# Allegro board Cuberobot.brd
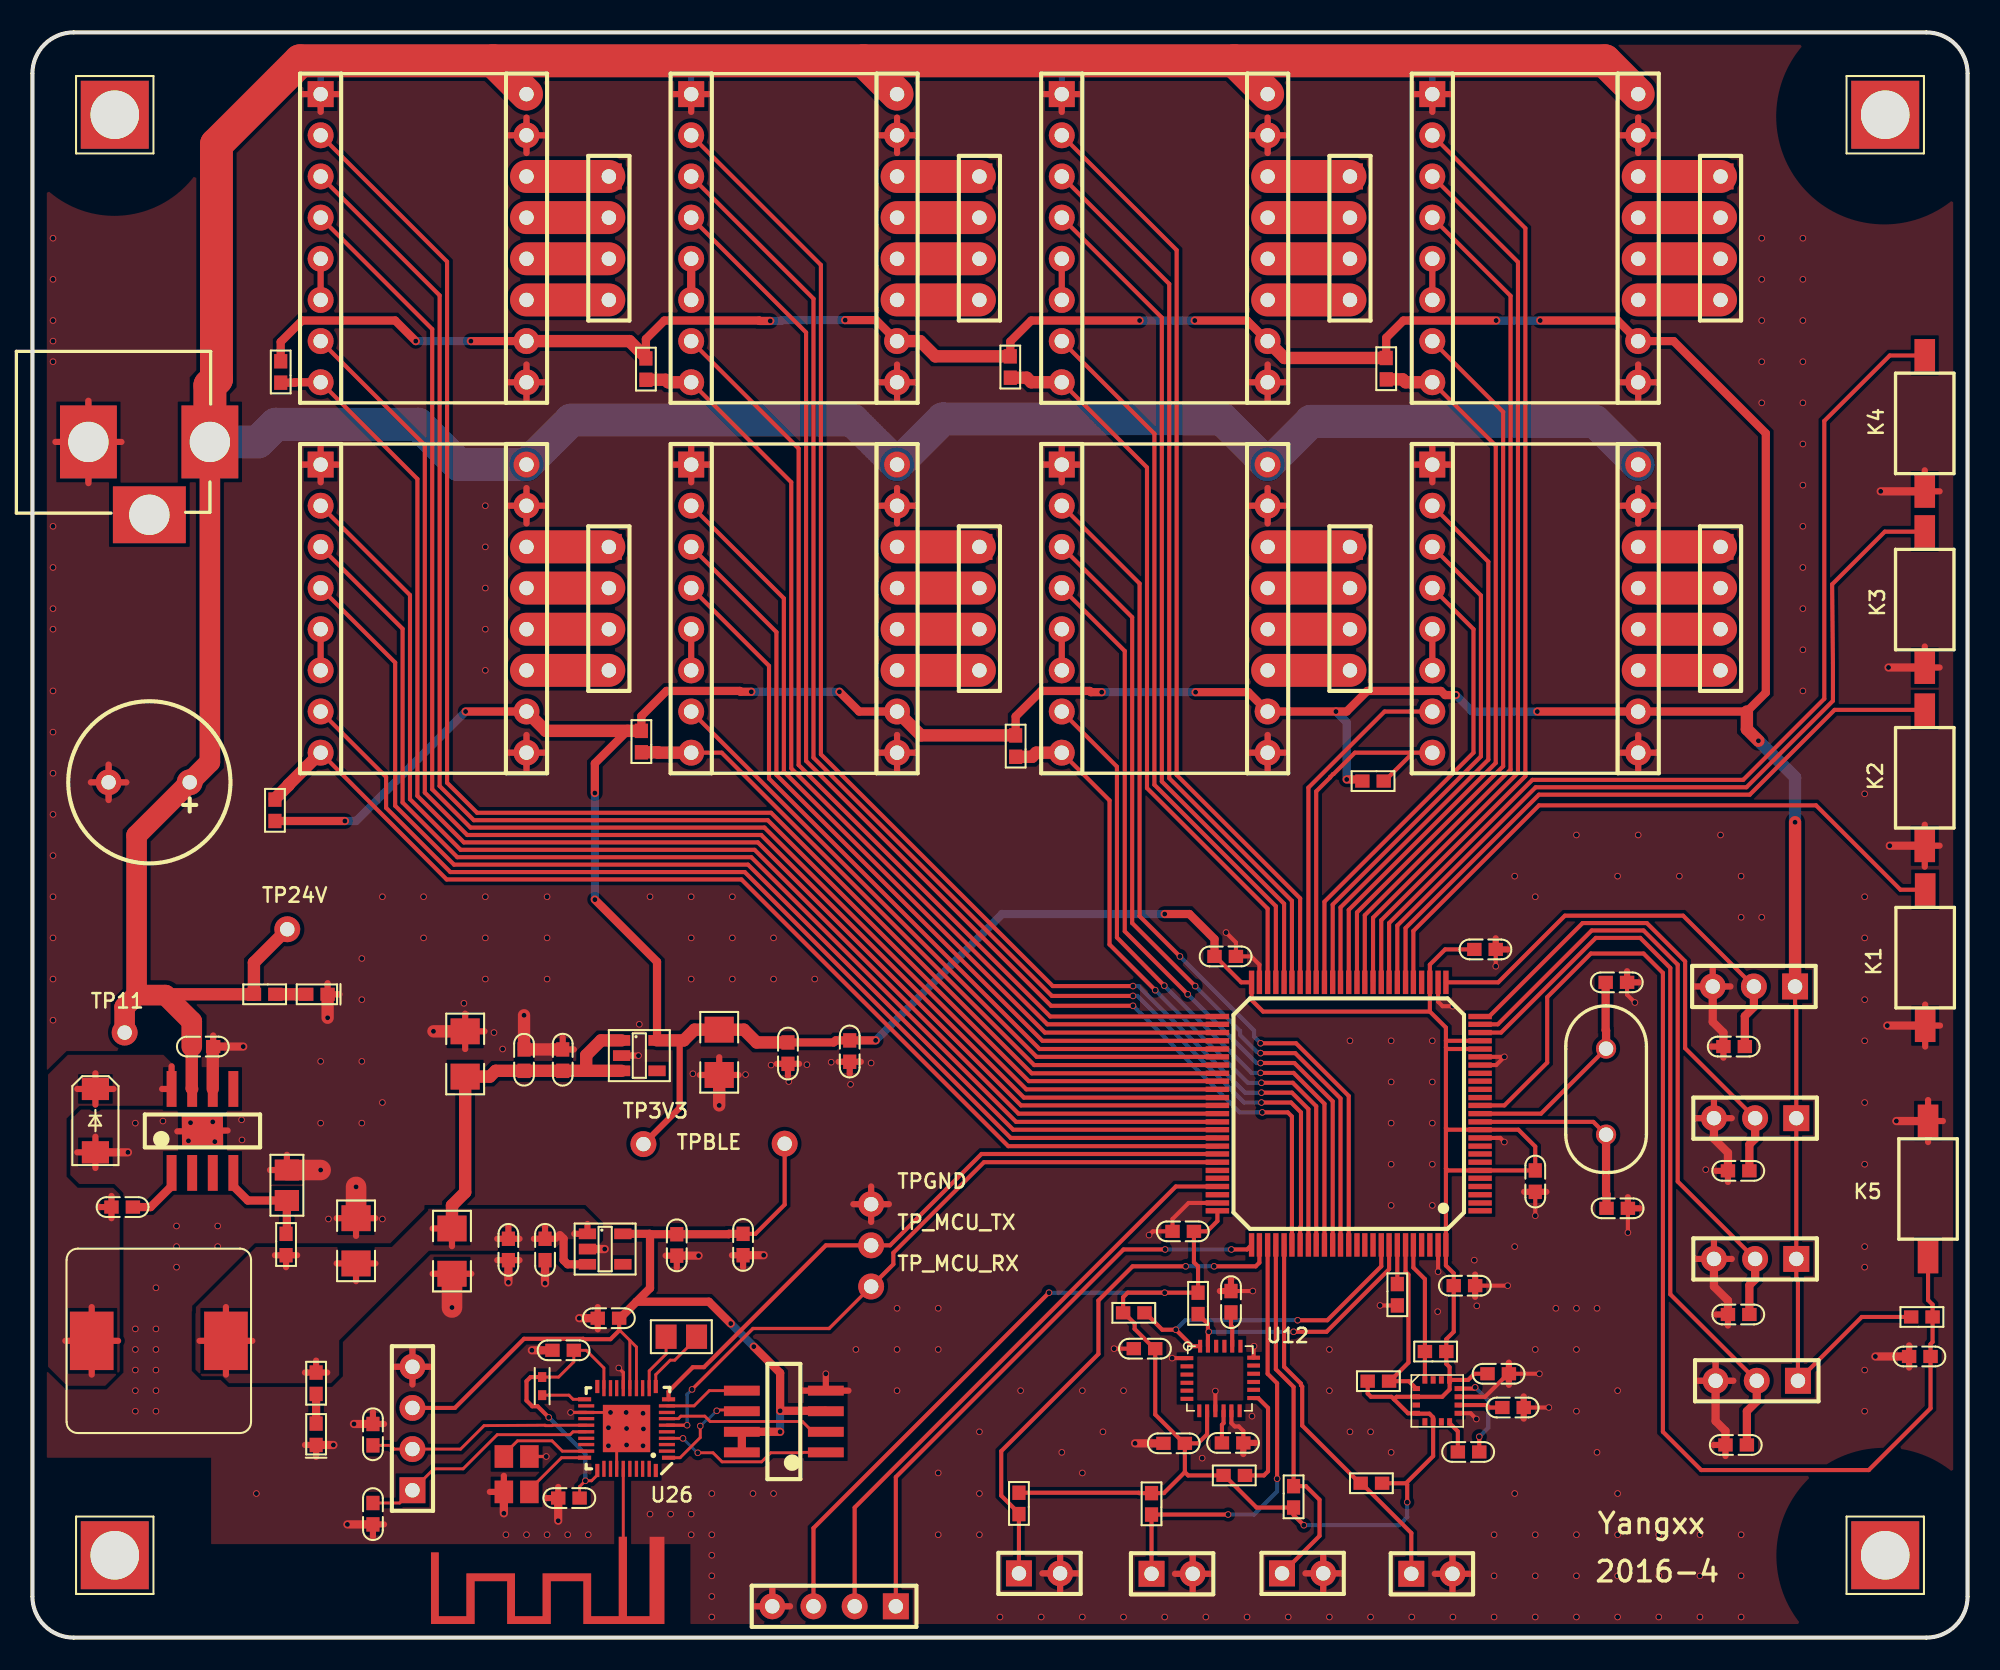
[diagram p0: board, top side]
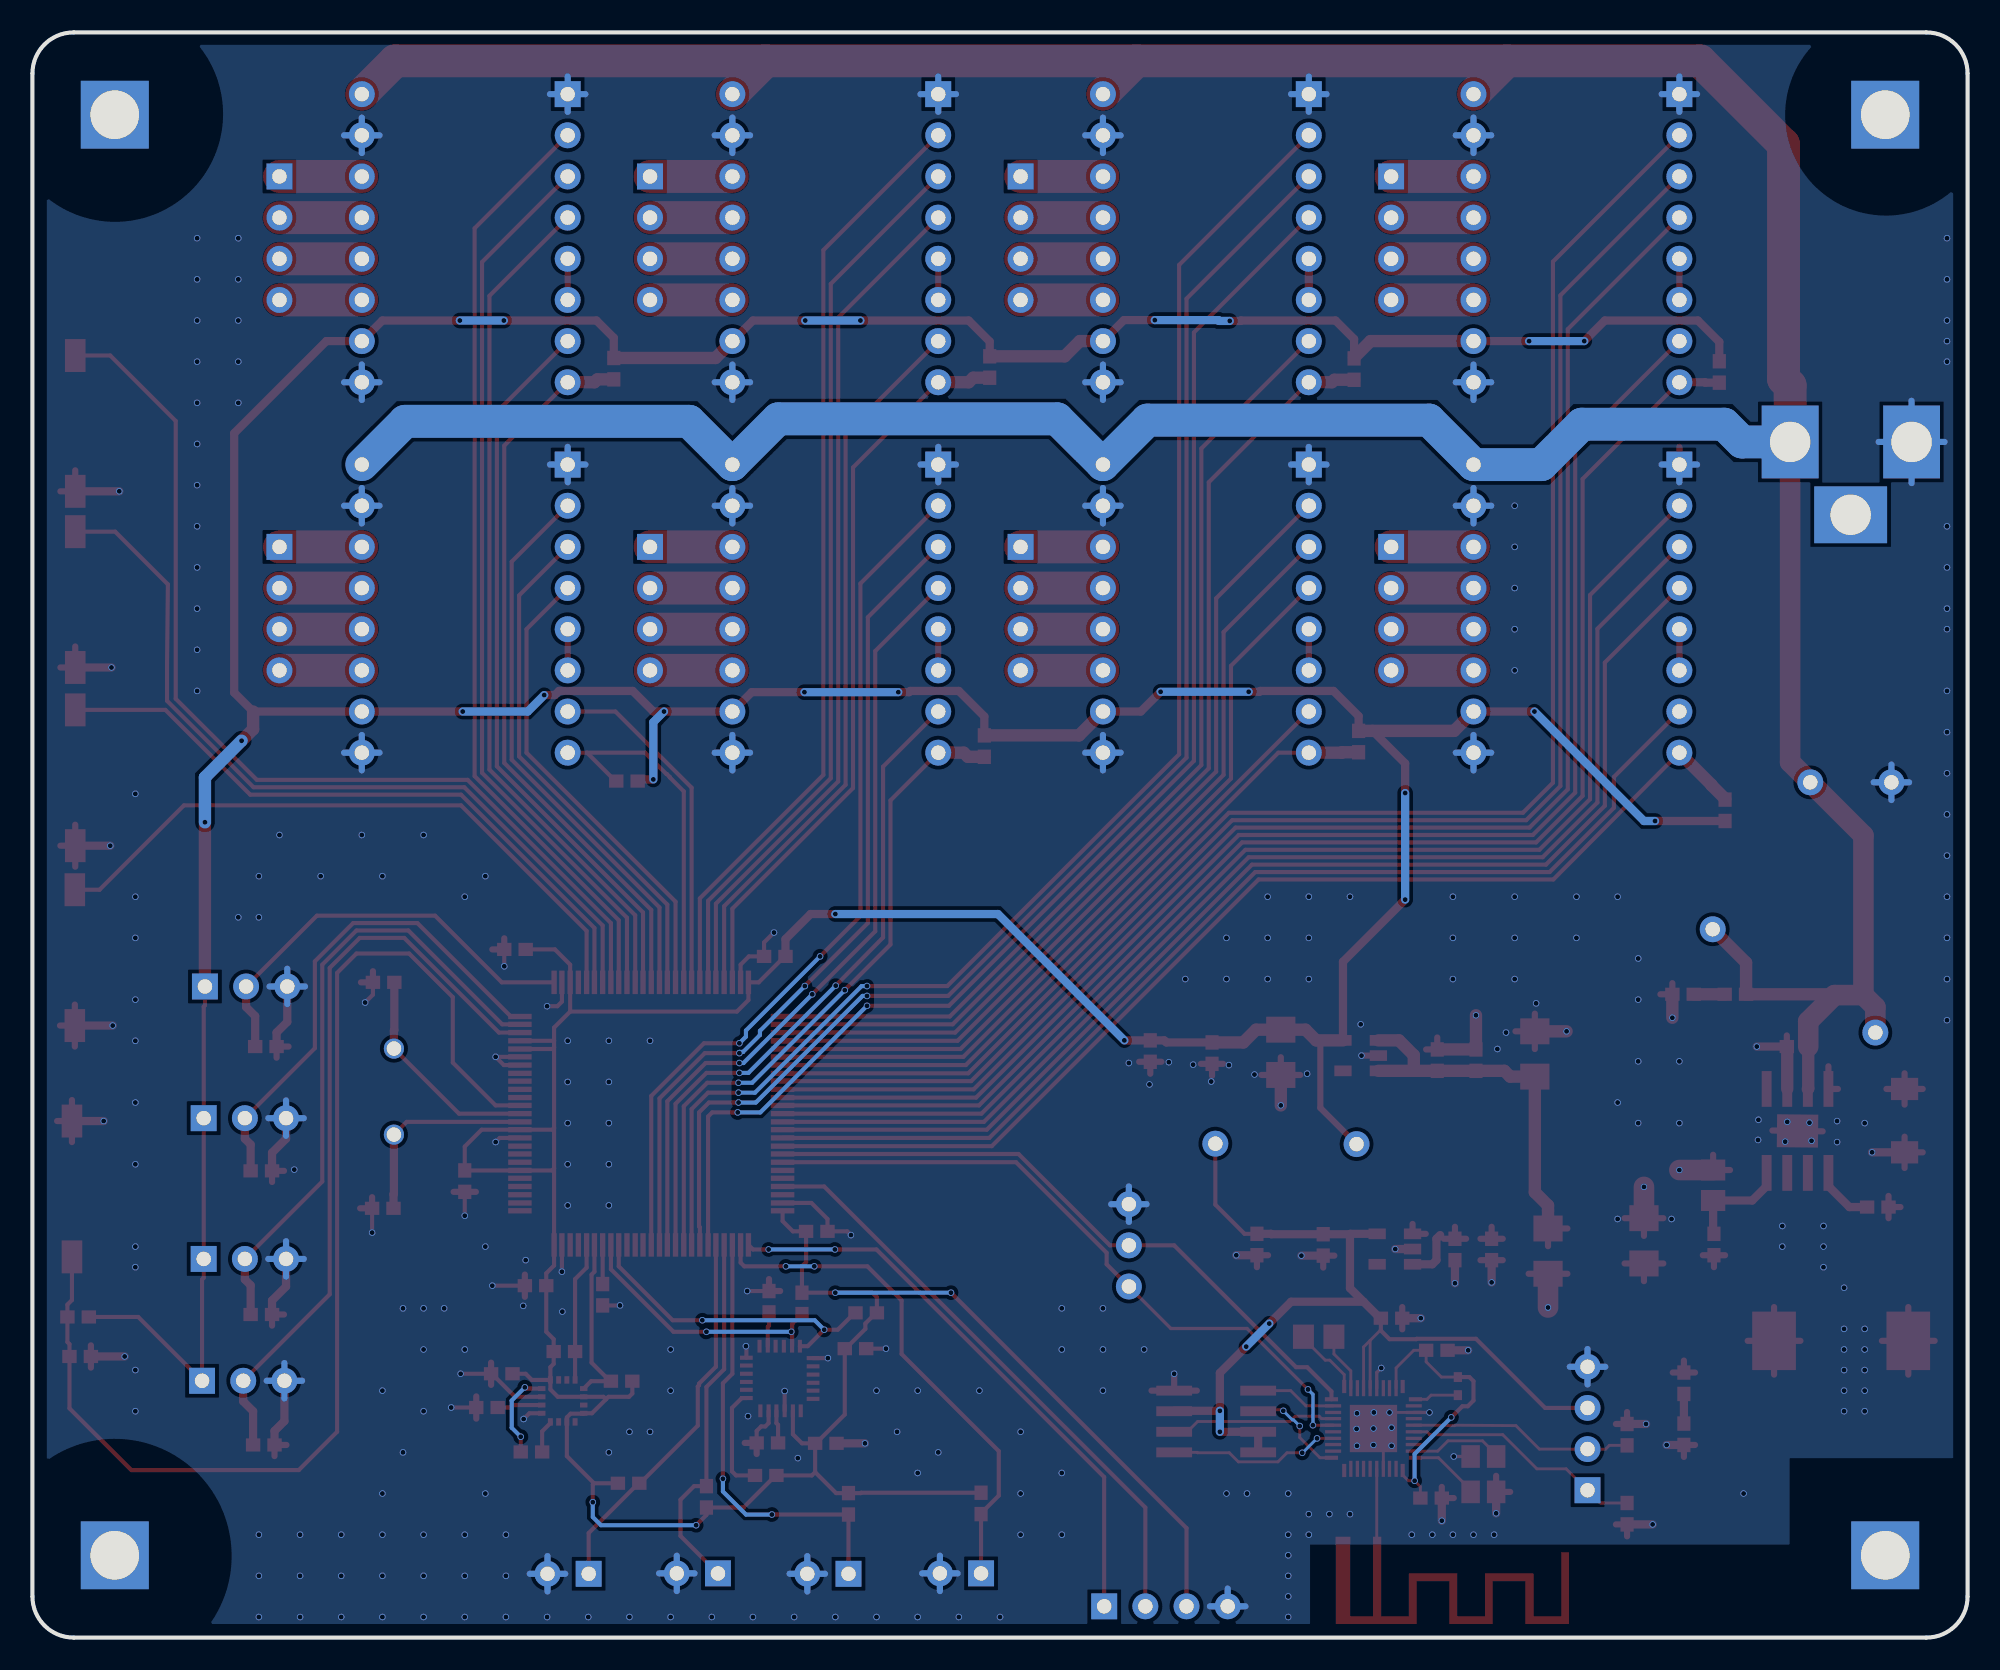
[diagram p1: board, bottom side, seen from below]

Outline 119.38 x 99.06 mm; copper layers: TOP, BOTTOM. Coordinates in mm from the lower left corner of the outline.
Outline path: 0,96.52 0,2.54 arc(0.74,0.74) 2.54,0 116.84,0 arc(118.64,0.74) 119.38,2.54 119.38,96.52 arc(118.64,98.32) 116.84,99.06 2.54,99.06 arc(0.74,98.32) 0,96.52

## Placement (name value [footprint] x y rotation side)
C2  22pF  [0603C]  97.76 26.49 180 top
C3  22pF  [0603C]  97.71 40.44 180 top
C4  104  [0603C]  116.43 17.35 0 top
C5  105  [0603C]  32.72 35.64 270 top
C6  103  [0603C]  50.42 36.2 90 top
C8  1uF  [0603C]  29.36 23.95 90 top
C9  103  [0603C]  43.84 24.26 90 top
C15  103  [0603C]  70.43 11.99 0 top
C16  104  [0603C]  74.04 12.01 180 top
C17  104  [0603C]  68.61 17.83 180 top
C18  2.2nF  [0603C]  73.94 20.73 90 top
C29  104  [0603C]  46.61 36.07 90 top
C30  104  [0603C]  39.75 24.23 90 top
C31  10uF  [0603C]  30.33 35.64 270 top
C32  10uF  [0603C]  31.62 23.95 90 top
C41  104  [0603C]  70.99 25.07 0 top
C42  104  [0603C]  88.34 21.72 180 top
C43  104  [0603C]  92.71 28.17 90 top
C44  1uF  [0603C]  35.53 19.71 180 top
C45  104  [0603C]  32.74 17.73 180 top
C58  100uF  [1206C]  26.7 36.02 270 top
C60  22uF  [1206C]  25.88 23.85 90 top
C62  100uF  [1206C]  42.37 36.12 90 top
C63  104  [0603C]  90.42 16.28 180 top
C64  0.22uF  [0603C]  88.6 11.46 0 top
C65  4.7uF  [0603C]  91.34 14.2 0 top
C67  100pF  [0603C]  21.01 7.65 90 top
C68  100pF  [0603C]  21.01 12.52 270 top
C69  1uF  [0603C]  33.1 8.61 180 top
C70  103  [0603C]  5.54 26.57 180 top
C73  100uF  [CAP-5R0-10X13]  9.7 52.78 180 top
C74  4.7uF  [0603C]  10.49 36.47 180 top
C75  100uF  [1206C]  19.96 24.49 270 top
C76  104  [0603C]  73.58 42.04 180 top
C77  104  [0603C]  89.61 42.47 180 top
C78  104  [0603C]  105.11 11.89 0 top
C79  104  [0603C]  105.26 19.94 0 top
C80  104  [0603C]  104.98 36.47 0 top
C81  104  [0603C]  105.26 28.8 0 top
D1  B340A  [SMA]  3.89 31.9 270 top
D2  LED  [0603LED]  17.55 39.7 0 top
D3  LED  [0603LED]  17.5 12.55 270 top
J14  SIP1*4  [SIP-4-2R5]  104.14 67.31 270 top
J15  SIP1*4  [SIP-4-2R5]  104.14 90.17 270 top
J16  SIP1*4  [SIP-4-2R5]  81.28 67.31 270 top
J17  SIP1*4  [SIP-4-2R5]  81.28 90.17 270 top
J18  SIP1*4  [SIP-4-2R5]  58.42 67.31 270 top
J19  SIP1*4  [SIP-4-2R5]  58.42 90.17 270 top
J20  SIP1*4  [SIP-4-2R5]  35.56 67.31 270 top
J21  SIP1*4  [SIP-4-2R5]  35.56 90.17 270 top
J22  SIP1*4  [SIP-4-2R5]  53.26 1.93 180 top
J23  SIP1*4  [SIP-4-2R5]  23.44 9.09 90 top
J24  SIP1*3  [SIP-3-2R5]  108.92 15.85 180 top
J25  SIP1*3  [SIP-3-2R5]  108.81 23.37 180 top
J26  SIP1*3  [SIP-3-2R5]  108.81 32.05 180 top
J27  SIP1*3  [SIP-3-2R5]  108.74 40.18 180 top
J28  SIP1*2  [SIP-2-2R5]  77.09 3.96 0 top
J29  SIP1*2  [SIP-2-2R5]  85.06 3.94 0 top
J30  SIP1*2  [SIP-2-2R5]  60.86 3.96 0 top
J31  SIP1*2  [SIP-2-2R5]  69.04 3.94 0 top
K1  KEY  [KEY0_37X0_62]  116.76 41.96 90 top
K2  KEY  [KEY0_37X0_62]  116.74 53.06 90 top
K3  KEY  [KEY0_37X0_62]  116.74 64.06 90 top
K4  KEY  [KEY0_37X0_62]  116.74 74.93 90 top
K5  KEY  [KEY0_37X0_62]  116.94 27.69 270 top
L9  2.2uH  [0402L]  31.45 15.52 90 top
L10  22uH  [SMDPL-10R4X10R4X3R0]  7.8 18.31 90 top
R1  10K  [0603R]  116.56 19.79 0 top
R23  0R  [0603R]  74.14 10.01 0 top
R35  10K  [0603R]  84.2 21.16 270 top
R36  10K  [0603R]  15.65 24.26 270 top
R37  3.24K  [0805R]  15.7 27.91 270 top
R38  20K  [0603R]  14.33 39.7 180 top
R39  2K  [0603R]  17.5 15.7 90 top
R40  10K  [0603R]  86.56 17.65 0 top
R41  10K  [0603R]  82.7 52.86 180 top
R43  10K  [0603R]  83.52 78.31 90 top
R45  10K  [0603R]  60.33 78.41 90 top
R47  10K  [0603R]  60.66 55.02 90 top
R49  10K  [0603R]  37.57 55.3 90 top
R51  10K  [0603R]  37.85 78.28 90 top
R53  10K  [0603R]  14.96 51.05 270 top
R55  10K  [0603R]  15.32 78.11 90 top
R56  10K  [0603R]  71.91 20.62 90 top
R57  10K  [0603R]  67.94 20.04 180 top
R58  10K  [0603R]  83.03 15.82 0 top
R59  10K  [0603R]  77.8 8.69 270 top
R60  10K  [0603R]  82.6 9.53 0 top
R61  10K  [0603R]  60.86 8.28 90 top
R62  10K  [0603R]  69.04 8.26 90 top
TP3V3  TH  [TP_TH]  37.69 30.45 0 top
TP7  TH  [HOLES-3R00]  5.08 5.08 0 top
TP8  TH  [HOLES-3R00]  114.3 93.98 0 top
TP9  TH  [HOLES-3R00]  5.08 93.98 0 top
TP10  TH  [HOLES-3R00]  114.3 5.08 0 top
TP11  TH  [TP_TH]  5.69 37.34 90 top
TP24V  TH  [TP_TH]  15.72 43.71 0 top
TP_MCU_RX  TH  [TP_TH]  51.74 21.67 0 top
TP_MCU_TX  TH  [TP_TH]  51.74 24.21 0 top
TPBLE  TH  [TP_TH]  46.41 30.48 0 top
TPGND  TH  [TP_TH]  51.74 26.75 0 top
U2  RT9013  [SOT23-5]  37.44 35.92 270 top
U4  RT9013  [SOT23-5]  35.33 23.98 270 top
U12  MPU6050  [QFN24]  71.48 18.03 0 top
U18  W25X40  [SOP8_NOPAD]  46.35 13.34 90 top
U26  DA14580-01AT2  [QFN40_5_5]  36.65 12.9 180 top
U27  A4988_Module  [A4988]  86.36 72.39 270 top
U28  A4988_Module  [A4988]  86.36 95.25 270 top
U29  A4988_Module  [A4988]  63.5 72.39 270 top
U30  A4988_Module  [A4988]  63.5 95.25 270 top
U31  A4988_Module  [A4988]  40.64 72.39 270 top
U32  A4988_Module  [A4988]  40.64 95.25 270 top
U33  A4988_Module  [A4988]  17.78 72.39 270 top
U34  A4988_Module  [A4988]  17.78 95.25 270 top
U36  tps5430  [SOP8]  10.49 31.27 0 top
U37  -  [DC005]  3.56 73.69 0 top
U38  STM32F103VCT6  [LQFP100]  81.2 32.33 90 top
U39  -  [HMC5883L]  86.66 14.61 0 top
X1  XTAL/8MHz  [HC-49]  97.08 36.35 270 top
X2  32.768khz  [0805R]  40.03 18.57 0 top
Y1  16MHz  [OSC-4P-3R2X2R5-SMD]  29.87 10.08 270 top

## Library data of the parts
C2-C6 C8 C9 C15-C18 C29-C32 C41-C45 C58 C60 C62-C65 C67-C70 C74-C81 = CAPNP
C73 = Capacitor2
D1 = DIODE
D2 D3 = LED
J14-J23 = DIP1x4
J24-J27 = DIP1x3
J28-J31 = SIP-2
K1-K5 = KEY
L9 = IND
L10 = Inductor
R1 R23 R35-R41 R43 R45 R47 R49 R51 R53 R55-R62 = RESSMD
TP3V3 TP7-TP11 TP24V TP_MCU_RX TP_MCU_TX TPBLE TPGND = TP
U2 U4 = RT9013
U12 = MPU6050
U18 = W25X40CL
U26 = DA14580-01AT2
U27-U34 = A4988_Module
U36 = tps5430
U37 = DC005
U38 = STM32F103VXT6
U39 = HMC5883L
X1 X2 = XTAL
Y1 = OSC3225

## Footprints (pads in the part's own frame, mm; a bottom-side part is the same pattern mirrored in y, then rotated)
0402L
  rect 0.61x0.508 smd: 1(-0.559,0) 2(0.559,0)
0603C
  rect 0.889x0.813 smd: 1(-0.66,0) 2(0.66,0)
0603LED
  rect 0.889x0.813 smd: 1(-0.66,0) 2(0.66,0)
0603R
  rect 0.889x0.813 smd: 1(-0.66,0) 2(0.66,0)
0805R
  rect 1.295x1.499 smd: 1(-0.94,0) 2(0.94,0)
1206C
  rect 1.6x1.803 smd: 1(-1.397,0) 2(1.397,0)
A4988
  rect 1.6x1.6 hole 0.889: 1(0,0)
  round 1.6 hole 0.889: 2(2.54,0) 3(5.08,0) 4(7.62,0) 5(10.16,0) 6(12.7,0) 7(15.24,0) 8(17.78,0) 9(17.78,12.7) 10(15.24,12.7) 11(12.7,12.7) 12(10.16,12.7) 13(7.62,12.7) 14(5.08,12.7) 15(2.54,12.7) 16(0,12.7)
CAP-5R0-10X13
  round 1.6 hole 0.889: 1(0,0) 2(5.004,0)
DC005
  rect 3.505x4.496 hole 2.489: 1(7.391,0.102) 2(-0.102,0.102)
  rect 4.496x3.505 hole 2.489: 3(3.658,-4.394)
HC-49
  round 1.245 hole 0.889: 1(0,0) 2(5.309,0)
HMC5883L
  rect 0.457x0.305 smd: 1(-1.295,0.762) 2(-1.295,0.254) 3(-1.295,-0.254) 4(-1.295,-0.762) 9(1.295,-0.762) 10(1.295,-0.254) 11(1.295,0.254) 12(1.295,0.762)
  rect 0.305x0.457 smd: 5(-0.762,-1.295) 6(-0.254,-1.295) 7(0.254,-1.295) 8(0.762,-1.295) 13(0.762,1.295) 14(0.254,1.295) 15(-0.254,1.295) 16(-0.762,1.295)
HOLES-3R00
  rect 4.191x4.191 hole 2.997: 1(0,0)
KEY0_37X0_62
  rect 2.032x1.27 smd: 1(-4.191,0) 2(4.191,0)
LQFP100
  rect 0.33x1.448 smd: 1(-5.994,-8.103) 2(-5.512,-8.103) 3(-5.004,-8.103) 4(-4.496,-8.103) 5(-3.988,-8.103) 6(-3.505,-8.103) 7(-2.997,-8.103) 8(-2.489,-8.103) 9(-2.007,-8.103) 10(-1.499,-8.103) 11(-0.991,-8.103) 12(-0.508,-8.103) 13(0,-8.103) 14(0.508,-8.103) 15(0.991,-8.103) 16(1.499,-8.103) 17(2.007,-8.103) 18(2.489,-8.103) 19(2.997,-8.103) 20(3.505,-8.103) 21(3.988,-8.103) 22(4.496,-8.103) 23(5.004,-8.103) 24(5.512,-8.103) 25(5.994,-8.103) 51(5.994,8.103) 52(5.512,8.103) 53(5.004,8.103) 54(4.496,8.103) 55(3.988,8.103) 56(3.505,8.103) 57(2.997,8.103) 58(2.489,8.103) 59(2.007,8.103) 60(1.499,8.103) 61(0.991,8.103) 62(0.508,8.103) 63(0,8.103) 64(-0.508,8.103) 65(-0.991,8.103) 66(-1.499,8.103) 67(-2.007,8.103) 68(-2.489,8.103) 69(-2.997,8.103) 70(-3.505,8.103) 71(-3.988,8.103) 72(-4.496,8.103) 73(-5.004,8.103) 74(-5.512,8.103) 75(-5.994,8.103)
  rect 1.448x0.33 smd: 26(8.103,-5.994) 27(8.103,-5.512) 28(8.103,-5.004) 29(8.103,-4.496) 30(8.103,-3.988) 31(8.103,-3.505) 32(8.103,-2.997) 33(8.103,-2.489) 34(8.103,-2.007) 35(8.103,-1.499) 36(8.103,-0.991) 37(8.103,-0.508) 38(8.103,0) 39(8.103,0.508) 40(8.103,0.991) 41(8.103,1.499) 42(8.103,2.007) 43(8.103,2.489) 44(8.103,2.997) 45(8.103,3.505) 46(8.103,3.988) 47(8.103,4.496) 48(8.103,5.004) 49(8.103,5.512) 50(8.103,5.994) 76(-8.103,5.994) 77(-8.103,5.512) 78(-8.103,5.004) 79(-8.103,4.496) 80(-8.103,3.988) 81(-8.103,3.505) 82(-8.103,2.997) 83(-8.103,2.489) 84(-8.103,2.007) 85(-8.103,1.499) 86(-8.103,0.991) 87(-8.103,0.508) 88(-8.103,0) 89(-8.103,-0.508) 90(-8.103,-0.991) 91(-8.103,-1.499) 92(-8.103,-2.007) 93(-8.103,-2.489) 94(-8.103,-2.997) 95(-8.103,-3.505) 96(-8.103,-3.988) 97(-8.103,-4.496) 98(-8.103,-5.004) 99(-8.103,-5.512) 100(-8.103,-5.994)
OSC-4P-3R2X2R5-SMD
  rect 1.397x1.143 smd: 1(-1.092,-0.787) 2(1.092,-0.787) 3(1.092,0.787) 4(-1.092,0.787)
QFN24
  rect 0.787x0.254 smd: 1(-0.254,-0.787) 2(-0.254,-1.295) 3(-0.254,-1.803) 4(-0.254,-2.311) 5(-0.254,-2.794) 6(-0.254,-3.302) 13(3.861,-3.251) 14(3.861,-2.743) 15(3.861,-2.261) 16(3.861,-1.753) 17(3.861,-1.245) 18(3.861,-0.762)
  rect 0.254x0.787 smd: 7(0.508,-4.039) 8(0.991,-4.039) 9(1.499,-4.039) 10(2.007,-4.039) 11(2.489,-4.039) 12(2.997,-4.039) 19(3.048,-0.051) 20(2.54,-0.051) 21(2.057,-0.051) 22(1.549,-0.051) 23(1.041,-0.051) 24(0.559,-0.051)
QFN40_5_5
  rect 0.813x0.254 smd: 1(-2.591,1.803) 10(-2.591,-1.803) 21(2.591,-1.803) 30(2.591,1.803)
  rect 0.991x0.203 smd: 2(-2.489,1.397) 3(-2.489,0.991) 4(-2.489,0.61) 5(-2.489,0.203) 6(-2.489,-0.203) 7(-2.489,-0.61) 8(-2.489,-0.991) 9(-2.489,-1.397) 22(2.489,-1.397) 23(2.489,-0.991) 24(2.489,-0.61) 25(2.489,-0.203) 26(2.489,0.203) 27(2.489,0.61) 28(2.489,0.991) 29(2.489,1.397)
  rect 0.254x0.813 smd: 11(-1.803,-2.591) 20(1.803,-2.591) 31(1.803,2.591) 40(-1.803,2.591)
  rect 0.203x0.991 smd: 12(-1.397,-2.489) 13(-0.991,-2.489) 14(-0.61,-2.489) 15(-0.203,-2.489) 16(0.203,-2.489) 17(0.61,-2.489) 18(0.991,-2.489) 19(1.397,-2.489) 32(1.397,2.489) 33(0.991,2.489) 34(0.61,2.489) 35(0.203,2.489) 36(-0.203,2.489) 37(-0.61,2.489) 38(-0.991,2.489) 39(-1.397,2.489)
  rect 2.921x2.921 smd: 41(0,0)
SIP-2-2R5
  rect 1.6x1.6 hole 0.889: 1(0,0)
  round 1.6 hole 0.889: 2(2.54,0)
SIP-3-2R5
  rect 1.6x1.6 hole 0.889: 1(0,0)
  round 1.6 hole 0.889: 2(2.54,0) 3(5.08,0)
SIP-4-2R5
  rect 1.6x1.6 hole 0.889: 1(0,0)
  round 1.6 hole 0.889: 2(2.54,0) 3(5.08,0) 4(7.62,0)
SMA
  rect 1.372x1.676 smd: 1(1.956,0) 2(-1.956,0)
SMDPL-10R4X10R4X3R0
  rect 3.607x2.692 smd: 1(0,4.14) 2(0,-4.14)
SOP8
  rect 0.61x2.21 smd: 1(-1.905,-2.591) 2(-0.635,-2.591) 3(0.635,-2.591) 4(1.905,-2.591) 5(1.905,2.591) 6(0.635,2.591) 7(-0.635,2.591) 8(-1.905,2.591)
  rect 2.032x2.54 smd rot 90.6: 9(0,0)
SOP8_NOPAD
  rect 0.61x2.21 smd: 1(-1.905,-2.591) 2(-0.635,-2.591) 3(0.635,-2.591) 4(1.905,-2.591) 5(1.905,2.591) 6(0.635,2.591) 7(-0.635,2.591) 8(-1.905,2.591)
SOT23-5
  rect 0.66x1.067 smd: 1(-0.94,-1.092) 2(0,-1.092) 3(0.94,-1.092) 4(0.94,1.092) 5(-0.94,1.092)
TP_TH
  round 1.6 hole 0.889: 1(0,0)

## Nets
GND: C2.1 C3.1 C4.1 C5.1 C6.1 C8.1 C9.1 C15.1 C16.1 C17.2 C18.2 C29.1 C30.1 C31.1 C32.1 C41.1 C42.1 C43.1 C44.2 C45.2 C58.1 C60.1 C62.1 C63.1 C65.2 C67.1 C68.1 C69.2 C73.2 C74.1 C75.1 C76.1 C77.1 C78.1 C79.1 C80.1 C81.1 D1.1 D2.2 D3.2 J22.4 J23.4 J24.3 J25.3 J26.3 J27.3 J28.2 J29.2 J30.2 J31.2 K1.1 K2.1 K3.1 K4.1 K5.1 R35.2 R37.1 TPGND.1 U2.2(GND) U4.2(GND) U12.1(CLKIN) U12.9(AD0) U12.11(FSYNC) U12.18(GND) U18.4(GND) U26.16(GND) U26.23(VBAT1V) U26.34(RFIOM) U26.35(RFIOP) U26.41(THERM_PAD) U27.1(E\N\) U27.9(GND#9) U27.15(GND#15) U28.1(E\N\) U28.9(GND#9) U28.15(GND#15) U29.1(E\N\) U29.9(GND#9) U29.15(GND#15) U30.1(E\N\) U30.9(GND#9) U30.15(GND#15) U31.1(E\N\) U31.9(GND#9) U31.15(GND#15) U32.1(E\N\) U32.9(GND#9) U32.15(GND#15) U33.1(E\N\) U33.9(GND#9) U33.15(GND#15) U34.1(E\N\) U34.9(GND#9) U34.15(GND#15) U36.6(GND) U36.9(PWPD) U37.2(GND) U38.10(VSS_5) U38.19(VSSA) U38.20(VREF-) U38.27(VSS_4) U38.49(VSS_1) U38.74(VSS_2) U38.99(VSS_3) U39.9(GND#9) U39.11(GND#11) Y1.2 Y1.4
VCC_5V: C5.2 C8.2 C31.2 C32.2 C58.2 C60.2 C75.2 L10.2 R36.2 R39.2 U2.1(VIN) U2.3(EN) U4.1(VIN) U4.3(EN)
VDD3V3_BLE: C9.2 C30.2 C44.1 J23.3 TPBLE.1 U4.5(VOUT) U18.3(W\P\) U18.7(H\O\L\D\) U18.8(VCC) U26.14(VBAT_RF) U26.15(VBAT3V)
VDD3V3_MCU: C6.2 C15.2 C17.1 C29.2 C41.2 C42.2 C43.2 C62.2 C63.2 C76.2 C77.2 J22.3 J24.1 J25.1 J26.1 J27.1 R1.1 R23.1 R40.2 R41.2 R43.2 R45.2 R47.2 R49.2 R51.2 R53.2 R55.2 R56.2 R57.2 R58.1 R59.2 R60.2 R61.2 R62.2 TP3V3.1 U2.5(VOUT) U12.8(VLOGIC) U27.10(VDD) U28.10(VDD) U29.10(VDD) U30.10(VDD) U31.10(VDD) U32.10(VDD) U33.10(VDD) U34.10(VDD) U38.6(VBAT) U38.11(VDD_5) U38.21(VREF+) U38.22(VDDA) U38.28(VDD_4) U38.50(VDD_1) U38.75(VDD_2) U38.100(VDD_3) U39.2(VDD) U39.4(S1) U39.6(NC_3) U39.13(VDDIO)
AD0: C78.2 J24.2 U38.23(PA0)
AD1: C79.2 J25.2 U38.24(PA1)
AD2: C81.2 J26.2 U38.25(PA2)
AD3: C80.2 J27.2 U38.26(PA3)
BAT_AD: U26.2(P0_1)
BLE_TO_CPU: TP_MCU_RX.1 U26.6(P0_4) U38.69(PA10)
BOOT0: R35.1 U38.94(BOOT0)
BT_SWCLK: C67.2 J23.1 U26.26(SWCLK)
BT_SWDIO: C68.2 J23.2 U26.25(SWDIO)
CPU_TO_BLE: TP_MCU_TX.1 U26.10(P0_7) U38.68(PA9)
DC24V: C73.1 C74.2 R38.2 TP11.1 TP24V.1 U27.16(VMOT) U28.16(VMOT) U29.16(VMOT) U30.16(VMOT) U31.16(VMOT) U32.16(VMOT) U33.16(VMOT) U34.16(VMOT) U36.7(VIN) U37.1(VIN)
DIR_1: R41.1 U27.8(DIR) U38.42(PE11)
DIR_2: R43.1 U28.8(DIR) U38.38(PE7)
DIR_3: R47.1 U29.8(DIR) U38.84(PD3)
DIR_4: R45.1 U30.8(DIR) U38.48(PB11)
DIR_5: R49.1 U31.8(DIR) U38.57(PD10)
DIR_6: R51.1 U32.8(DIR) U38.52(PB13)
DIR_7: R53.1 U33.8(DIR) U38.67(PA8)
DIR_8: R55.1 U34.8(DIR) U38.62(PD15)
I2C_SCL_IMU: R56.1 U12.23(SCL) U38.93(PB7)
I2C_SDA_IMU: R57.1 U12.24(SDA) U38.92(PB6)
KEY1: K1.2 U38.30(PA5)
KEY2: K2.2 U38.31(PA6)
KEY3: K3.2 U38.32(PA7)
KEY4: K4.2 U38.33(PC4)
LS0: J28.1 R59.1 U38.79(PC11)
LS1: J29.1 R60.1 U38.80(PC12)
LS2: J30.1 R61.1 U38.77(PA15)
LS3: J31.1 R62.1 U38.78(PC10)
MAG_INT: U39.15(DRDY)
MAG_SCL: R58.2 U38.95(PB8) U39.1(SCL)
MAG_SDA: R40.1 U38.96(PB9) U39.16(SDA)
MISO: U18.2(DO) U26.7(P0_5)
MOSI: U18.5(DI) U26.9(P0_6)
MPU_6050_INT: U12.12(INT)
MS11: U27.2(MS1) U38.39(PE8)
MS12: U27.3(MS2) U38.40(PE9)
MS13: U27.4(MS3) U38.41(PE10)
MS21: U28.2(MS1) U38.34(PC5)
MS22: U28.3(MS2) U38.35(PB0)
MS23: U28.4(MS3) U38.36(PB1)
MS31: U29.2(MS1) U38.88(PD7)
MS32: U29.3(MS2) U38.87(PD6)
MS33: U29.4(MS3) U38.86(PD5)
MS41: U30.2(MS1) U38.44(PE13)
MS42: U30.3(MS2) U38.45(PE14)
MS43: U30.4(MS3) U38.46(PE15)
MS51: U31.2(MS1) U38.53(PB14)
MS52: U31.3(MS2) U38.54(PB15)
MS53: U31.4(MS3) U38.55(PD8)
MS61: U32.2(MS1) U38.83(PD2)
MS62: U32.3(MS2) U38.82(PD1)
MS63: U32.4(MS3) U38.81(PD0)
MS71: U33.2(MS1) U38.63(PC6)
MS72: U33.3(MS2) U38.64(PC7)
MS73: U33.4(MS3) U38.65(PC8)
MS81: U34.2(MS1) U38.58(PD11)
MS82: U34.3(MS2) U38.59(PD12)
MS83: U34.4(MS3) U38.60(PD13)
NC_1: U12.2(NC_1)
NC_2: U12.3(NC_2)
NC_3: U12.4(NC_3)
NC_4: U12.5(NC_4)
NC_5: U12.14(NC_5)
NC_6: U12.15(NC_6)
NC_7: U12.16(NC_7)
NC_8: U12.17(NC_8)
NRST: C4.2 K5.2 R1.2 U38.14(NRST)
P0_3: U18.1(C\S\) U26.4(P0_3)
P1_0: U26.22(P1_0)
P2_0: U26.40(P2_0)
P2_1: U26.8(P2_1)
P2_2: U26.13(P2_2)
P2_3: U26.18(P2_3)
P2_4: U26.20(P2_4)
P2_5: U26.32(P2_5)
P2_6: U26.33(P2_6)
P2_7: U26.36(P2_7)
P2_8: U26.37(P2_8)
P2_9: U26.39(P2_9)
PB3: U38.89(PB3)
PB4: U38.90(PB4)
PB5: U38.91(PB5)
PWRCHK: U26.27(P1_2)
RST: U26.17(RST)
SCLK: U18.6(CLK) U26.1(P0_0)
STEP_1: U27.7(STEP) U38.43(PE12)
STEP_2: U28.7(STEP) U38.37(PB2)
STEP_3: U29.7(STEP) U38.85(PD4)
STEP_4: U30.7(STEP) U38.47(PB10)
STEP_5: U31.7(STEP) U38.56(PD9)
STEP_6: U32.7(STEP) U38.51(PB12)
STEP_7: U33.7(STEP) U38.66(PC9)
STEP_8: U34.7(STEP) U38.61(PD14)
SWCLK: J22.1 U38.76(PA14)
SWDIO: J22.2 U38.72(PA13)
VDCDC: C45.1 C69.1 L9.2 U26.19(VDCDC) U26.31(VDCDC_RF)
XTAL_8M_1: C2.2 U38.12(OSC_IN) X1.2
XTAL_8M_2: C3.2 U38.13(OSC_OUT) X1.1
N16774269: U26.11(XTAL32KM) X2.2
N16774273: U26.12(XTAL32KP) X2.1
N16774277: U26.29(XTAL16MP) Y1.1
N16774293: U26.30(XTAL16MM) Y1.3
N16774335: L9.1 U26.21(SWITCH)
N16774531: U26.38(VPP)
N16774749: U26.24(P1_1)
N16774753: U26.28(P1_3)
N16774853: U26.3(P0_2)
N16779828: U27.5(R\S\T\) U27.6(S\L\P\)
N16781946: J14.1 U27.14(2A)
N16781949: J14.2 U27.13(2B)
N16781952: J14.3 U27.12(1A)
N16781955: J14.4 U27.11(1B)
N16782088: U28.5(R\S\T\) U28.6(S\L\P\)
N16782148: J15.1 U28.14(2A)
N16782150: J15.2 U28.13(2B)
N16782152: J15.3 U28.12(1A)
N16782154: J15.4 U28.11(1B)
N16782514: U29.5(R\S\T\) U29.6(S\L\P\)
N16782574: J16.1 U29.14(2A)
N16782576: J16.2 U29.13(2B)
N16782578: J16.3 U29.12(1A)
N16782580: J16.4 U29.11(1B)
N16782582: U30.5(R\S\T\) U30.6(S\L\P\)
N16782654: J17.1 U30.14(2A)
N16782656: J17.2 U30.13(2B)
N16782658: J17.3 U30.12(1A)
N16782660: J17.4 U30.11(1B)
N16783067: U31.5(R\S\T\) U31.6(S\L\P\)
N16783127: J18.1 U31.14(2A)
N16783129: J18.2 U31.13(2B)
N16783131: J18.3 U31.12(1A)
N16783133: J18.4 U31.11(1B)
N16783135: U32.5(R\S\T\) U32.6(S\L\P\)
N16783207: J19.1 U32.14(2A)
N16783209: J19.2 U32.13(2B)
N16783211: J19.3 U32.12(1A)
N16783213: J19.4 U32.11(1B)
N16784006: U33.5(R\S\T\) U33.6(S\L\P\)
N16784066: J20.1 U33.14(2A)
N16784068: J20.2 U33.13(2B)
N16784070: J20.3 U33.12(1A)
N16784072: J20.4 U33.11(1B)
N16784074: U34.5(R\S\T\) U34.6(S\L\P\)
N16784146: J21.1 U34.14(2A)
N16784148: J21.2 U34.13(2B)
N16784150: J21.3 U34.12(1A)
N16784152: J21.4 U34.11(1B)
N16789605: C70.2 D1.2 L10.1 U36.8(PH)
N16792399: R36.1 R37.2 U36.4(VSNS)
N16801584: D2.1 R38.1
N16804138: D3.1 R39.1
N16840893: U38.29(PA4)
N16841180: U38.8(PC14)
N16841183: U38.7(PC13)
N16843413: C18.1 U12.20(CPOUT)
N16843463: C16.2 U12.10(REGOUT)
N16843543: R23.2 U12.13(VDD)
N16843618: C64.1 U39.8(STEP)
N16843634: C64.2 U39.12(SETC)
N16855859: U38.15(PC0)
N16855862: U38.16(PC1)
N16855865: U38.17(PC2)
N16855868: U38.18(PC3)
N16869382: U38.97(PE0)
N16869385: U38.98(PE1)
N16869388: U38.1(PE2)
N16869391: U38.2(PE3)
N16869394: U38.3(PE4)
N16869397: U38.4(PE5)
N16869400: U38.5(PE6)
N167889588: C70.1 U36.1(BOOT)
N168435809: C65.1 U39.10(C1)

Pads without a net: TP7 1; TP8 1; TP9 1; TP10 1; U2 4; U4 4; U12 6 7 19 21 22; U26 5; U36 2 3 5; U37 3; U38 9 70 71 73; U39 3 5 7 14

## Via types
v1: diameter 0.406, hole 0.305, TOP to BOTTOM, 357 vias

## Routing (per net, layer and track width the routed paths; a pad name or vN(x,y) marks a point on that pad's centre or on a via; arc(x,y) is an arc through that point)
GND: length 528.6
  TOP w0.178: v1(36.65,12.9) 36.04,12.29 U26.34 ; U26.35 36.45,5.79 36.3,5.79 ; 36.45,13.11 v1(35.66,13.89) U26.23
  TOP w0.203: U26.16 36.45,16.36 v1(36.17,16.64) ; U26.23 v1(33.2,13.89) ; Y1.4 v1(31.7,11.18) ; 36.45,13.11 v1(36.65,12.9)
  TOP w0.254: U38.99 v1(86.72,22.58) ; C43.1 v1(92.71,26.04) ; U38.10 90.55,30.84 v1(90.81,30.58) ; v1(98.86,39.19) 98.37,39.67 C3.1 ; U38.20 v1(90.81,35.84) 90.3,35.33 U38.19 ; v1(87.63,38.96) 87,38.96 86.72,39.24 U38.27 ; U39.9 88.72,13.84 v1(89.08,13.49) ; C42.1 v1(91.01,21.72) ; U12.11 73.96,13.23 74.17,13.03 74.42,13.03 74.7,12.75 C16.1 ; U39.11 89.61,14.86 91.03,16.28 C63.1 v1(92.96,16.28) ; U38.49 75.69,41.53 75.18,42.04 C76.1 74.24,42.9 v1(73.63,43.51) ; C77.1 v1(90.27,41.43) ; U12.1 v1(70.31,17.25) ; U12.18 75.34,17.96 v1(75.36,17.98) ; C18.2 v1(75.29,21.39) ; v1(68.88,24.84) 69.11,25.07 C41.1 70.33,25.83 71.32,26.82 U38.74 ; C2.1 v1(98.42,24.99) ; U12.9 v1(72.97,15.21) ; 67.94,17.83 v1(66.73,17.83) ; R35.2 v1(83.13,20.5) ; C65.2 v1(93.55,14.2)
  TOP w0.381: U28.15 99.06,93.8 ; U28.15 97.97,92.71 ; U28.15 99.06,91.62 ; U28.15 100.15,92.71 ; 85.27,95.25 U28.1 ; U28.1 86.36,94.16 ; U28.1 87.45,95.25 ; 75.11,92.71 U30.15 ; U30.15 77.29,92.71 ; U30.15 76.2,93.8 ; U30.15 76.2,91.62 ; 116.94,30.58 K5.1 ; K5.1 117.86,31.88 ; K5.1 116.94,33.17 ; 24.69,22.45 C60.1 27.08,22.45 ; 102.57,40.18 J27.3 ; J27.3 103.66,41.27 ; J27.3 104.75,40.18 ; 39.75,22.83 C30.1 39.07,23.57 ; 70.48,3.94 J31.2 ; J31.2 71.58,5.03 ; J31.2 71.58,2.84 ; J31.2 72.67,3.94 ; 17.5,11.15 D3.2 16.81,11.89 ; J23.4 23.44,17.81 ; J23.4 24.54,16.71 ; J23.4 22.35,16.71 ; J23.4 23.44,15.62 ; 19.96,24.79 C75.1 ; C75.1 18.77,25.88 ; C75.1 21.16,25.88 ; 52.25,69.85 U31.15 ; U31.15 53.34,70.94 ; U31.15 53.34,68.76 ; U31.15 54.43,69.85 ; U30.9 77.29,77.47 ; U30.9 76.2,78.56 ; U30.9 75.11,77.47 ; U30.9 76.2,76.38 ; 117.65,70.74 K4.1 116.74,72.03 ; U37.2 3.45,76.33 ; U37.2 3.45,71.25 ; U37.2 5.49,73.79 ; U37.2 1.42,73.79 ; C73.2 5.79,52.78 ; C73.2 4.7,53.87 ; C73.2 3.61,52.78 ; C73.2 4.7,51.69 ; U29.1 63.5,73.48 ; U29.1 62.41,72.39 ; U29.1 64.59,72.39 ; U29.1 63.5,71.3 ; 44.55,1.93 J22.4 ; J22.4 45.64,3.02 ; J22.4 46.74,1.93 ; K2.1 117.65,48.87 ; K2.1 116.74,50.16 ; K2.1 116.74,47.57 ; 45.92,35.41 C29.1 ; C29.1 47.29,35.41 ; C29.1 46.61,34.67 ; 104.32,35.79 C80.1 103.58,36.47 ; U28.9 100.15,77.47 ; U28.9 97.97,77.47 ; U28.9 99.06,78.56 ; U28.9 99.06,76.38 ; 29.39,92.71 U34.15 ; U34.15 30.48,93.8 ; U34.15 30.48,91.62 ; U34.15 31.57,92.71 ; 104.6,19.25 C79.1 103.86,19.94 ; U27.15 100.15,69.85 ; U27.15 99.06,70.94 ; U27.15 97.97,69.85 ; U27.15 99.06,68.76 ; 53.34,53.52 U31.9 ; U31.9 54.43,54.61 ; U31.9 53.34,55.7 ; U31.9 52.25,54.61 ; J28.2 80.72,3.96 ; J28.2 79.63,5.05 ; J28.2 78.54,3.96 ; J28.2 79.63,2.87 ; 86.36,71.3 U27.1 ; U27.1 87.45,72.39 ; U27.1 86.36,73.48 ; U27.1 85.27,72.39 ; U27.9 99.06,55.7 ; U27.9 97.97,54.61 ; U27.9 100.15,54.61 ; U27.9 99.06,53.52 ; 91.01,42.47 C77.1 90.27,43.15 ; 30.48,53.52 U33.9 ; U33.9 29.39,54.61 ; U33.9 30.48,55.7 ; U33.9 31.57,54.61 ; D1.1 3.89,30.91 ; D1.1 2.77,29.95 ; D1.1 3.89,28.98 ; J26.3 104.83,32.05 ; J26.3 102.64,32.05 ; J26.3 103.73,33.15 ; 99.11,40.44 C3.1 98.37,41.12 ; U32.15 53.34,93.8 ; U32.15 54.43,92.71 ; U32.15 52.25,92.71 ; U32.15 53.34,91.62 ; 73.25,21.39 C18.2 73.94,22.12 ; 43.84,22.86 C9.1 43.15,23.6 ; 115.77,16.66 C4.1 115.77,18.03 ; U31.1 40.64,73.48 ; U31.1 39.55,72.39 ; U31.1 41.73,72.39 ; U31.1 40.64,71.3 ; 32.72,37.03 C5.1 33.4,36.3 ; 103.86,28.8 C81.1 104.6,28.12 ; 17.78,94.16 U34.1 ; U34.1 18.87,95.25 ; U34.1 16.69,95.25 ; C58.1 27.89,37.41 ; C58.1 26.7,36.32 ; C58.1 26.7,38.51 ; 39.55,95.25 U32.1 ; U32.1 41.73,95.25 ; U32.1 40.64,94.16 ; 92,13.51 C65.2 92,14.88 ; 91.08,15.6 C63.1 91.08,16.97 ; J24.3 104.93,15.85 ; J24.3 102.74,15.85 ; J24.3 103.84,16.94 ; J29.2 87.6,5.03 ; J29.2 86.51,3.94 ; J29.2 87.6,2.84 ; J29.2 88.7,3.94 ; 29.39,69.85 U33.15 ; U33.15 31.57,69.85 ; U33.15 30.48,70.94 ; U33.15 30.48,68.76 ; 76.2,53.52 U29.9 ; U29.9 76.2,55.7 ; U29.9 77.29,54.61 ; U29.9 75.11,54.61 ; J25.3 103.73,24.46 ; J25.3 102.64,23.37 ; J25.3 104.83,23.37 ; 75.11,69.85 U29.15 ; U29.15 76.2,70.94 ; U29.15 77.29,69.85 ; U29.15 76.2,68.76 ; U18.4 50.34,15.24 ; U18.4 v1(48.95,16.28) ; U18.4 47.55,15.24 ; 21.69,6.99 C67.1 21.01,6.25 ; 29.39,77.47 U34.9 ; U34.9 31.57,77.47 ; U34.9 30.48,76.38 ; U34.9 30.48,78.56 ; 51.74,25.65 TPGND.1 ; TPGND.1 51.74,27.84 ; TPGND.1 52.83,26.75 ; TPGND.1 50.65,26.75 ; 31.7,8.61 C69.2 32.44,9.3 ; J30.2 63.4,5.05 ; J30.2 64.49,3.96 ; J30.2 63.4,2.87 ; J30.2 62.31,3.96 ; 34.87,19.02 C44.2 34.87,20.4 ; 15.7,29.79 R37.1 14.66,28.85 ; U30.1 64.59,95.25 ; U30.1 62.41,95.25 ; U30.1 63.5,94.16 ; 28.68,23.29 C8.1 30.05,23.29 ; C62.1 42.37,35.81 ; C62.1 43.56,34.72 ; C62.1 41.17,34.72 ; 103.71,11.89 C78.1 104.44,11.2 ; 18.95,39.7 D2.2 18.21,40.39 ; 8.94,31.24 U36.9 12.04,31.29 ; 11.15,35.79 C74.1 11.15,37.16 ; K1.1 117.68,37.77 ; K1.1 116.76,39.07 ; K1.1 116.76,36.47 ; 21.69,13.18 C68.1 21.01,13.92 ; 92.02,27.51 C43.1 93.4,27.51 ; U33.1 17.78,73.48 ; U33.1 17.78,71.3 ; U33.1 16.69,72.39 ; U33.1 18.87,72.39 ; 98.42,27.18 C2.1 99.16,26.49 ; U32.9 54.43,77.47 ; U32.9 53.34,76.38 ; U32.9 52.25,77.47 ; U32.9 53.34,78.56 ; 49.73,35.53 C6.1 ; C6.1 51.1,35.53 ; C6.1 50.42,34.8 ; 74.7,11.33 C16.1 75.44,12.01 ; 89,22.4 C42.1 89,21.03 ; 117.65,59.87 K3.1 116.74,61.16 ; 29.08,9.98 Y1.2 28.22,8.99 ; U2.2 v1(37.39,35.92)
  TOP w0.508: U4.2 v1(35.31,23.98) ; J26.3 103.73,30.78 104.6,29.92 C81.1 ; C30.1 v1(41.1,23.57) ; C4.1 v1(113.69,17.35) ; C44.2 v1(33.73,19.71) ; D3.2 v1(18.57,11.89) ; C67.1 v1(19.43,6.99) ; C15.1 v1(68.02,11.99) ; C69.2 v1(32.44,7.21) ; C45.2 v1(30.81,17.73) ; K3.1 v1(114.5,59.87) ; K2.1 v1(114.58,48.87) ; C74.1 v1(13,36.47) ; J25.3 103.73,21.67 104.6,20.8 C79.1 ; K5.1 v1(114.99,31.88) ; K1.1 v1(114.43,37.77) ; Y1.2 v1(29.08,7.67) ; C80.1 104.32,37.34 103.66,38 J27.3 ; J24.3 103.84,13.36 104.44,12.75 C78.1 ; C68.1 v1(19.84,13.18) ; C9.1 v1(45.11,23.6) ; D1.1 v1(5.89,29.95) ; K4.1 v1(114.02,70.74) ; C8.1 v1(29.36,21.92) ; C32.1 v1(31.62,21.87)
  TOP w0.762: C58.1 v1(24.74,37.41) ; C62.1 v1(42.37,32.84) ; C74.1 11.13,36.45 U36.6 ; v1(30.33,38.4) C31.1 C5.1 ; D2.2 v1(18.21,38.25)
  TOP w1.27: R37.1 v1(17.78,28.85) ; C75.1 v1(19.96,27.81) ; C60.1 v1(25.88,20.37)
  BOTTOM w0.381: 62.31,3.96 J30.2 ; J30.2 63.4,2.87 ; J30.2 63.4,5.05 ; J30.2 64.49,3.96 ; 1.42,73.79 U37.2 ; U37.2 3.45,71.25 ; U37.2 3.45,76.33 ; U37.2 5.49,73.79 ; U33.15 30.48,70.94 ; U33.15 29.39,69.85 ; U33.15 30.48,68.76 ; U33.15 31.57,69.85 ; 97.97,54.61 U27.9 ; U27.9 99.06,55.7 ; U27.9 100.15,54.61 ; U27.9 99.06,53.52 ; 29.39,92.71 U34.15 ; U34.15 31.57,92.71 ; U34.15 30.48,91.62 ; U34.15 30.48,93.8 ; U27.1 87.45,72.39 ; U27.1 86.36,73.48 ; U27.1 85.27,72.39 ; U27.1 86.36,71.3 ; 75.11,92.71 U30.15 ; U30.15 76.2,93.8 ; U30.15 77.29,92.71 ; U30.15 76.2,91.62 ; U31.9 54.43,54.61 ; U31.9 53.34,53.52 ; U31.9 52.25,54.61 ; U31.9 53.34,55.7 ; 85.27,95.25 U28.1 ; U28.1 87.45,95.25 ; U28.1 86.36,94.16 ; U28.1 86.36,96.34 ; J27.3 103.66,41.27 ; J27.3 102.57,40.18 ; J27.3 104.75,40.18 ; J27.3 103.66,39.09 ; U31.15 54.43,69.85 ; U31.15 52.25,69.85 ; U31.15 53.34,70.94 ; U31.15 53.34,68.76 ; J24.3 103.84,16.94 ; J24.3 103.84,14.76 ; J24.3 102.74,15.85 ; J24.3 104.93,15.85 ; J26.3 103.73,33.15 ; J26.3 103.73,30.96 ; J26.3 104.83,32.05 ; J26.3 102.64,32.05 ; U34.1 18.87,95.25 ; U34.1 17.78,94.16 ; U34.1 17.78,96.34 ; U34.1 16.69,95.25 ; U28.15 100.15,92.71 ; U28.15 97.97,92.71 ; U28.15 99.06,91.62 ; U28.15 99.06,93.8 ; 86.51,3.94 J29.2 ; J29.2 88.7,3.94 ; J29.2 87.6,2.84 ; J29.2 87.6,5.03 ; 97.97,69.85 U27.15 ; U27.15 99.06,68.76 ; U27.15 100.15,69.85 ; U27.15 99.06,70.94 ; 71.58,2.84 J31.2 ; J31.2 72.67,3.94 ; J31.2 70.48,3.94 ; J31.2 71.58,5.03 ; 52.25,92.71 U32.15 ; U32.15 54.43,92.71 ; U32.15 53.34,91.62 ; U32.15 53.34,93.8 ; C73.2 4.7,53.87 ; C73.2 3.61,52.78 ; C73.2 5.79,52.78 ; C73.2 4.7,51.69 ; 39.55,72.39 U31.1 ; U31.1 41.73,72.39 ; U31.1 40.64,73.48 ; U31.1 40.64,71.3 ; 76.2,76.38 U30.9 ; U30.9 77.29,77.47 ; U30.9 75.11,77.47 ; U30.9 76.2,78.56 ; 75.11,69.85 U29.15 ; U29.15 77.29,69.85 ; U29.15 76.2,70.94 ; U29.15 76.2,68.76 ; 75.11,54.61 U29.9 ; U29.9 76.2,55.7 ; U29.9 76.2,53.52 ; U29.9 77.29,54.61 ; U29.1 63.5,73.48 ; U29.1 62.41,72.39 ; U29.1 63.5,71.3 ; U29.1 64.59,72.39 ; J22.4 46.74,1.93 ; J22.4 44.55,1.93 ; J22.4 45.64,3.02 ; U28.9 99.06,78.56 ; U28.9 100.15,77.47 ; U28.9 97.97,77.47 ; U28.9 99.06,76.38 ; 79.63,2.87 J28.2 ; J28.2 78.54,3.96 ; J28.2 79.63,5.05 ; J28.2 80.72,3.96 ; 102.64,23.37 J25.3 ; J25.3 104.83,23.37 ; J25.3 103.73,22.28 ; J25.3 103.73,24.46 ; U30.1 64.59,95.25 ; U30.1 63.5,94.16 ; U30.1 62.41,95.25 ; U30.1 63.5,96.34 ; U32.1 41.73,95.25 ; U32.1 40.64,96.34 ; U32.1 40.64,94.16 ; U32.1 39.55,95.25 ; U34.9 30.48,78.56 ; U34.9 31.57,77.47 ; U34.9 30.48,76.38 ; U34.9 29.39,77.47 ; U32.9 53.34,78.56 ; U32.9 53.34,76.38 ; U32.9 52.25,77.47 ; U32.9 54.43,77.47 ; J23.4 24.54,16.71 ; J23.4 22.35,16.71 ; J23.4 23.44,15.62 ; J23.4 23.44,17.81 ; U33.1 18.87,72.39 ; U33.1 17.78,71.3 ; U33.1 16.69,72.39 ; TPGND.1 51.74,27.84 ; TPGND.1 51.74,25.65 ; TPGND.1 52.83,26.75 ; TPGND.1 50.65,26.75 ; U33.9 30.48,55.7 ; U33.9 31.57,54.61 ; U33.9 29.39,54.61 ; U33.9 30.48,53.52
  vias: v1(1.27,86.36) v1(1.27,83.82) v1(1.27,81.28) v1(1.27,80.01) v1(1.27,78.74) v1(1.27,68.58) v1(1.27,66.04) v1(1.27,63.5) v1(1.27,62.23) v1(1.27,58.42) v1(1.27,55.88) v1(1.27,53.34) v1(1.27,50.8) v1(1.27,48.26) v1(1.27,45.72) v1(1.27,43.18) v1(1.27,40.64) v1(1.27,38.1) v1(6.35,31.75) v1(6.35,19.05) v1(6.35,17.78) v1(6.35,16.51) v1(6.35,15.24) v1(6.35,13.97) v1(7.62,21.59) v1(7.62,19.05) v1(7.62,17.78) v1(7.62,16.51) v1(7.62,15.24) v1(7.62,13.97) v1(8.05,31.88) v1(8.05,30.58) v1(8.89,25.4) v1(8.89,24.13) v1(8.89,22.86) v1(9.63,30.66) v1(9.75,31.78) v1(11.13,31.83) v1(11.25,30.61) v1(11.43,25.4) v1(11.43,24.13) v1(12.9,31.95) v1(12.93,30.71) v1(13.82,8.89) v1(17.78,35.56) v1(17.78,31.75) v1(18.26,25.83) v1(20.32,41.91) v1(20.32,39.37) v1(20.32,35.56) v1(20.32,31.75) v1(21.59,45.72) v1(21.59,33.02) v1(21.59,25.83) v1(24.13,45.72) v1(24.13,43.18) v1(26.62,39.14) v1(27.94,69.85) v1(27.94,67.31) v1(27.94,64.77) v1(27.94,62.23) v1(27.94,59.69) v1(27.94,45.72) v1(27.94,43.18) v1(27.94,40.64) v1(28.47,37.34) v1(29.01,36.32) v1(29.21,6.35) v1(30.48,6.35) v1(31.75,45.72) v1(31.75,43.18) v1(31.75,40.64) v1(31.75,6.35) v1(33.02,6.35) v1(34.29,6.35) v1(35.53,12.95) v1(35.53,11.84) v1(36.63,13.89) v1(36.65,11.89) v1(37.44,37.85) v1(37.67,13.84) v1(37.69,12.88) v1(37.67,11.84) v1(38.1,45.72) v1(38.1,7.62) v1(39.37,7.62) v1(40.64,45.72) v1(40.64,43.18) v1(40.64,40.64) v1(40.64,7.62) v1(40.64,6.35) v1(40.74,34.8) v1(41.91,8.89) v1(41.91,6.35) v1(41.91,5.08) v1(41.91,3.81) v1(41.91,2.54) v1(41.91,1.27) v1(43.18,45.72) v1(43.18,43.18) v1(43.18,40.64) v1(43.99,34.75) v1(44.45,8.89) v1(45.57,35.33) v1(45.72,43.18) v1(45.72,40.64) v1(45.72,8.89) v1(46.66,34.32) v1(47.78,35.36) v1(48.26,40.64) v1(49.28,35.51) v1(50.47,34.14) v1(50.8,17.78) v1(51.74,35.46) v1(53.34,20.32) v1(53.34,17.78) v1(53.34,15.24) v1(55.88,20.32) v1(55.88,17.78) v1(55.88,10.16) v1(55.88,6.35) v1(58.42,12.7) v1(58.42,8.89) v1(58.42,6.35) v1(59.69,1.27) v1(60.96,15.24) v1(62.23,1.27) v1(63.5,11.43) v1(64.77,15.24) v1(64.77,10.16) v1(64.77,1.27) v1(66.04,12.7) v1(67.31,15.24) v1(67.31,1.27) v1(69.85,1.27) v1(72.16,11.07) v1(72.39,1.27) v1(74.93,1.27) v1(75.23,13.67) v1(77.47,1.27) v1(80.01,17.78) v1(80.01,15.24) v1(80.01,1.27) v1(81.28,36.83) v1(81.28,12.7) v1(82.55,12.7) v1(82.55,1.27) v1(83.82,36.83) v1(83.82,34.29) v1(83.82,31.75) v1(83.82,29.21) v1(83.82,26.67) v1(83.82,11.43) v1(85.09,1.27) v1(86.36,36.83) v1(86.36,34.29) v1(86.36,31.75) v1(86.36,29.21) v1(86.36,26.67) v1(86.69,20.12) v1(87.63,1.27) v1(88.95,23.29) v1(89.1,20.47) v1(90.17,6.35) v1(90.17,3.81) v1(90.17,1.27) v1(91.44,46.99) v1(91.44,24.13) v1(91.44,8.89) v1(92.71,45.72) v1(92.71,17.78) v1(92.71,6.35) v1(92.71,3.81) v1(92.71,1.27) v1(93.98,20.32) v1(95.25,49.53) v1(95.25,20.32) v1(95.25,17.78) v1(95.25,13.97) v1(95.25,6.35) v1(95.25,3.81) v1(95.25,1.27) v1(96.52,20.32) v1(96.52,11.43) v1(97.79,46.99) v1(97.79,15.24) v1(97.79,8.89) v1(97.79,6.35) v1(97.79,3.81) v1(97.79,1.27) v1(99.06,49.53) v1(100.33,6.35) v1(100.33,3.81) v1(100.33,1.27) v1(101.6,46.99) v1(102.87,6.35) v1(102.87,3.81) v1(102.87,1.27) v1(103.23,28.88) v1(104.14,49.53) v1(105.41,46.99) v1(105.41,44.45) v1(105.41,6.35) v1(105.41,3.81) v1(105.41,1.27) v1(106.68,86.36) v1(106.68,83.82) v1(106.68,81.28) v1(106.68,78.74) v1(106.68,76.2) v1(106.68,44.45) v1(109.22,86.36) v1(109.22,83.82) v1(109.22,81.28) v1(109.22,78.74) v1(109.22,76.2) v1(109.22,73.66) v1(109.22,71.12) v1(109.22,68.58) v1(109.22,66.04) v1(109.22,63.5) v1(109.22,60.96) v1(109.22,58.42) v1(113.03,52.07) v1(113.03,45.72) v1(113.03,43.18) v1(113.03,39.37) v1(113.03,36.83) v1(113.03,33.02) v1(113.03,29.21) v1(113.03,24.13) v1(113.03,22.86) v1(113.03,16.51) v1(113.03,13.97)
VCC_5V: length 49.3
  TOP w0.381: 30.94,24.61 C32.2 ; C32.2 32.31,24.61 ; C32.2 31.62,25.35 ; 25.88,24.16 C60.2 24.69,25.25 ; R36.2 16.33,23.6 ; R36.2 15.65,22.86 ; R36.2 14.96,23.6 ; C8.2 29.36,25.35 ; C8.2 30.05,24.61 ; C8.2 28.68,24.61 ; R39.2 18.19,16.36 ; R39.2 17.5,17.09 ; R39.2 16.81,16.36 ; 19.96,22 C75.2 ; C75.2 18.77,23.09 ; C75.2 21.16,23.09 ; L10.2 11.94,20.4 ; L10.2 10.31,18.31 ; L10.2 11.94,16.23 ; L10.2 13.56,18.31 ; 34.24,25.53 U4.1 33.43,24.92
  TOP w0.508: U4.3 33.02,23.04 32.77,23.29 32.77,24.61 32.54,24.84
  TOP w0.762: 34.16,34.98 C5.2 C31.2 28.57,34.98 28.22,34.62 C58.2 26.7,27.48 25.88,26.67 C60.2 ; 34.16,34.98 U2.3 ; 34.16,34.98 34.16,35.94 35.08,36.86 U2.1
VDD3V3_BLE: length 63.8
  TOP w0.178: 36.2,19 36.86,18.34 ; 36.86,18.34 37.26,17.93 U26.14 ; 36.86,18.34 U26.15
  TOP w0.254: C44.1 36.2,18.95 35.66,18.41 34.01,18.41 33.99,18.44 30.33,18.44 26.06,14.17 J23.3 ; C9.2 44.6,24.92 46.41,26.72 TPBLE.1
  TOP w0.508: 38.1,24.89 38.07,24.92 U4.5 ; 38.1,24.89 38.1,21.56 37.26,20.73 ; 38.1,24.89 C30.2 42.95,24.89 42.98,24.92 C9.2 ; 37.26,20.73 36.25,19.71 C44.1 ; 37.26,20.73 41.73,20.73 v1(43.08,19.38) ; v1(46.13,12.7) U18.7 U18.8 ; v1(44.5,17.96) 46.13,16.33 v1(46.13,14) 48.92,14 U18.3
  BOTTOM w0.508: v1(46.13,12.7) v1(46.13,14) ; v1(44.5,17.96) v1(43.08,19.38)
VDD3V3_MCU: length 515.5
  TOP w0.254: 87.2,31.45 87.2,28.96 ; 87.2,31.45 87.2,36.42 ; 87.2,31.45 87.3,31.34 U38.11 91.67,31.34 92.71,30.3 C43.2 87.33,28.83 87.2,28.96 ; 87.2,28.96 U38.100 87.2,22.96 87.68,22.48 C42.2 87.68,18.87 87.22,18.41 R40.2 87.22,16.89 87.43,16.69 U39.13 ; v1(62.71,21.29) 48.18,6.76 J22.3 ; U12.8 72.47,12.55 71.91,11.99 C15.2 ; 87.2,36.42 87.3,36.32 U38.21 ; 87.2,36.42 87.2,36.83 ; U38.22 87.2,36.83 ; 87.2,36.83 87.2,37.64 86.21,38.63 ; C76.2 72.97,42.04 74.57,40.44 U38.50 75.21,39.34 75.92,38.63 86.21,38.63 ; 71.09,10.21 C15.2 ; 71.09,10.21 69.8,8.92 R62.2 68.28,8.92 68.25,8.94 R61.2 ; 71.09,10.21 71.3,10.01 R23.1 73.53,10.01 75.51,8.03 R59.2 77.8,7.57 v1(78.44,6.93) ; C15.2 71.04,11.99 69.27,13.77 C17.1 69.22,17.83 68,19.05 68,19.38 67.34,20.04 R57.2 67.28,21.01 67.56,21.29 v1(69.85,21.29) R56.2 71.91,22.91 71.65,23.16 C41.2 72.47,25.07 73.1,25.7 U38.75 ; 84.73,9.53 84.81,9.45 v1(84.81,8.36) ; 84.73,9.53 86.41,11.2 U39.6 86.41,13.59 86.18,13.82 85.39,13.82 U39.4 84.86,13.84 84,14.71 ; 84.73,9.53 R60.2 ; U39.13 87.43,15.32 86.97,14.86 U39.2 84.15,14.86 84,14.71 ; U39.13 88.57,15.9 88.95,16.28 C63.2 ; 84,14.71 83.85,14.86 82.58,14.86 82.37,15.06 R58.1 ; 86.21,38.63 U38.28 86.21,41.53 87.15,42.47 C77.2 ; R1.1 112.85,19.79 J24.1 108.92,22.1 108.81,22.2 J25.1 J26.1 108.81,38.94 108.74,39.01 J27.1
  TOP w0.381: 40.18,36.86 39.93,36.6 39.93,32.69 TP3V3.1
  TOP w0.508: v1(71.7,81.28) 74.93,81.28 U30.10 ; U32.10 52.04,81.31 v1(50.14,81.31) ; v1(92.84,57.15) U27.10 105.77,57.15 106.93,58.32 106.93,74.32 101.24,80.01 U28.10 97.79,81.28 v1(93.01,81.28) ; v1(45.52,81.25) 44.86,81.25 44.83,81.28 38.99,81.28 37.85,80.14 37.85,78.99 ; R55.2 15.32,79.96 16.64,81.28 22.38,81.28 v1(23.65,80.01) ; R45.2 60.33,79.98 61.62,81.28 v1(68.3,81.28) ; v1(26.72,57.15) U33.10 ; v1(34.7,52.12) 34.7,53.95 36.7,55.96 ; v1(90.3,81.28) 84.58,81.28 83.52,80.21 R43.2 ; U31.10 51,57.15 v1(49.78,58.37) ; v1(71.75,58.34) 75.01,58.34 U29.10 v1(80.42,57.15) 81.08,57.15 82.35,58.42 86.89,58.42 87.15,58.17 v1(87.81,58.17) ; v1(69.85,44.65) 71.37,44.65 72.92,43.1 C76.2 ; v1(44.35,58.37) 43.69,58.37 43.64,58.42 39.12,58.42 37.57,56.87 R49.2 ; v1(52.02,36.86) C6.2 49.56,36.86 49.43,36.73 C29.2 ; R47.2 60.66,56.85 62.23,58.42 65.23,58.42 65.3,58.34 v1(65.96,58.34) ; R41.2 81.94,52.96 v1(81.08,52.96) ; v1(27.05,80.01) U34.10 ; v1(34.7,45.54) 38.53,41.71 U2.5 ; R53.2 v1(19.28,50.39)
  TOP w0.762: R43.2 77.24,78.97 U30.10 ; J27.1 v1(108.74,50.32) ; C29.2 44.68,36.73 43.89,37.52 C62.2 40.84,37.52 40.18,36.86 U2.5 ; U33.10 31.67,55.96 R49.2 ; R47.2 54.81,55.68 U31.10 ; 105.77,57.15 105.77,56.06 v1(106.48,55.35) ; R51.2 37.85,78.99 36.83,80.01 U34.10 ; R45.2 55.7,79.07 54.76,80.01 U32.10
  BOTTOM w0.254: v1(62.71,21.29) v1(69.85,21.29) ; v1(78.44,6.93) 84.3,6.93 84.81,7.44 v1(84.81,8.36)
  BOTTOM w0.508: v1(80.42,57.15) 81.08,56.49 v1(81.08,52.96) ; v1(26.72,57.15) 19.96,50.39 v1(19.28,50.39) ; v1(45.52,81.25) 46.18,81.25 46.23,81.31 v1(50.14,81.31) ; v1(34.7,45.54) v1(34.7,52.12) ; v1(69.85,44.65) 59.82,44.65 v1(52.02,36.86) ; v1(90.3,81.28) v1(93.01,81.28) ; v1(49.78,58.37) v1(44.35,58.37) ; v1(65.96,58.34) v1(71.75,58.34) ; v1(87.81,58.17) 88.82,57.15 v1(92.84,57.15) ; v1(23.65,80.01) v1(27.05,80.01) ; v1(68.3,81.28) v1(71.7,81.28)
  BOTTOM w0.762: v1(108.74,50.32) 108.74,53.09 v1(106.48,55.35)
AD0: length 46.8
  TOP w0.254: U38.23 90.6,37.34 96.44,43.18 99.19,43.18 101.04,41.33 101.04,21.18 J24.2
  TOP w0.508: C78.2 105.77,13.97 106.38,14.58 J24.2
AD1: length 39.2
  TOP w0.254: U38.24 90.4,37.85 96.19,43.64 99.39,43.64 101.5,41.53 101.5,28.14 J25.2
  TOP w0.508: C79.2 105.92,21.74 106.27,22.1 J25.2
AD2: length 30.9
  TOP w0.254: J26.2 101.96,36.37 101.96,41.73 99.59,44.09 95.63,44.09 89.87,38.33 U38.25
  TOP w0.508: J26.2 106.27,30.78 105.92,30.43 C81.2
AD3: length 26.5
  TOP w0.254: U38.26 90.42,40.44 94.54,44.55 101.83,44.55 J27.2
  TOP w0.508: J27.2 106.2,38.91 105.64,38.35 C80.2
BLE_TO_CPU: length 42.2
  TOP w0.203: U26.6 v1(40.39,13.11) ; TP_MCU_RX.1 49.15,19.08 44.45,19.08 v1(40.69,15.32)
  TOP w0.254: 73.1,29.34 58.7,29.34 53.11,23.75 53.11,23.04 TP_MCU_RX.1
  BOTTOM w0.203: v1(40.39,13.11) 40.39,15.01 v1(40.69,15.32)
BOOT0: length 2.4
  TOP w0.254: 84.2,24.23 R35.1
BT_SWCLK: length 15
  TOP w0.178: C67.2 22.66,8.31 J23.1 24.77,10.41 26.57,10.41 28.68,12.52 33.17,12.52 33.35,12.7 U26.26
BT_SWDIO: length 13.9
  TOP w0.178: U26.25 32.08,13.11 32.05,13.08 31.65,13.08 31.62,13.11 27.86,13.08 26.42,11.63 J23.2 22.33,11.63 22.1,11.86 C68.2
CPU_TO_BLE: length 40.4
  TOP w0.254: U26.10 39.24,15.19 40.74,16.69 41.43,16.69 48.95,24.21 TP_MCU_TX.1 52.91,24.21 58.55,29.84 73.1,29.84
DC24V: length 271.6
  TOP w0.762: TP24V.1 13.67,41.66 R38.2 8.26,39.7 8.2,39.65 ; C74.2 9.83,33.88 U36.7
  TOP w1.27: 6.43,39.65 5.69,38.91 TP11.1 ; 6.43,39.65 6.43,49.5 C73.1 10.95,54.03 U37.1 ; 6.43,39.65 8.2,39.65 9.83,38.02 C74.2
  TOP w2.032: U28.16 97,97.31 74.14,97.31 ; 74.14,97.31 U30.16 ; 74.14,97.31 51.28,97.31 ; 28.42,97.31 16.51,97.31 11.35,92.15 11.35,77.67 10.95,77.27 U37.1 ; 28.42,97.31 U34.16 ; 28.42,97.31 51.28,97.31 ; 51.28,97.31 U32.16
  BOTTOM w2.032: U27.16 96.39,75.06 78.87,75.06 U29.16 73.38,75.21 56.16,75.21 U31.16 50.6,75.13 33.22,75.13 U33.16 26.29,72.39 23.8,74.88 15.01,74.88 13.92,73.79 U37.1
DIR_1: length 22.5
  TOP w0.254: U27.8 85.17,54.61 ; 85.17,54.61 83.41,52.86 R41.1 ; 85.17,54.61 81.58,54.61 80.26,53.29 80.24,53.29 80.06,53.11 80.06,53.09 79.2,52.22 U38.42
DIR_2: length 45.3
  TOP w0.254: U38.38 81.2,44.91 90.27,53.98 90.27,73.56 U28.8
  TOP w0.762: R43.1 84.53,77.65 84.71,77.47 U28.8
DIR_3: length 41.5
  TOP w0.254: U38.84 79.2,32.79 77.75,34.24 v1(75.82,34.24) ; U29.8 66.45,51.66 66.45,42.77 v1(69.27,39.95)
  TOP w0.762: U29.8 61.93,54.61 61.67,54.36 R47.1
  BOTTOM w0.254: v1(75.82,34.24) 74.98,34.24 v1(69.27,39.95)
DIR_4: length 45.6
  TOP w0.254: U38.48 76.2,44.98 68.76,52.43 68.76,72.21 U30.8
  TOP w0.762: R45.1 61.34,77.75 61.62,77.47 U30.8
DIR_5: length 43.5
  TOP w0.254: U31.8 42.52,54.61 61.8,35.33 U38.57
  TOP w0.762: U31.8 38.61,54.61 38.58,54.64 R49.1
DIR_6: length 62.1
  TOP w0.254: U32.8 46.81,71.3 46.81,53.64 62.61,37.85 U38.52
  TOP w0.762: U32.8 39.22,77.47 39.07,77.62 R51.1
DIR_7: length 69.5
  TOP w0.254: U38.67 60.2,30.33 43.74,46.79 25.55,46.79 U33.8
  TOP w0.762: U33.8 15.8,52.63 15.8,52.6 14.96,51.77 R53.1
DIR_8: length 87.7
  TOP w0.254: U38.62 60.99,32.84 44.75,49.07 26.62,49.07 23.75,51.94 23.75,71.5 U34.8
  TOP w0.508: U34.8 16.21,77.47 16.18,77.44 R55.1
I2C_SCL_IMU: length 16.5
  TOP w0.254: U12.23 72.52,18.82 v1(72.57,18.87) 72.52,18.92 72.52,19.35 R56.1 ; U38.93 83.69,22.73 79.83,18.87 v1(77.8,18.87)
  BOTTOM w0.254: v1(72.57,18.87) v1(77.8,18.87)
I2C_SDA_IMU: length 19.9
  TOP w0.254: v1(78.05,19.58) 79.88,19.58 83.21,22.91 U38.92 ; U12.24 71.55,17.98 v1(70.54,19) 69.7,19 68.66,20.04 R57.1
  BOTTOM w0.254: v1(78.05,19.58) 71.12,19.58 v1(70.54,19)
KEY1: length 40.1
  TOP w0.254: U38.30 85.19,43.61 92.94,51.36 110.03,51.36 115.24,46.15 K1.2
KEY2: length 41
  TOP w0.254: U38.31 84.71,43.79 92.94,52.02 105.94,52.02 111.18,57.25 K2.2
KEY3: length 50.4
  TOP w0.254: K3.2 114.27,68.25 111.02,65 111.07,60.15 111.07,57.81 105.74,52.48 92.74,52.48 84.2,43.94 84.2,40.44
KEY4: length 61.3
  TOP w0.254: 116.74,79.12 114.58,79.12 110.54,75.08 110.54,57.94 105.54,52.93 92.53,52.93 83.69,44.09 U38.33
LS0: length 22.8
  TOP w0.254: J28.1 79.4,6.27 79.4,8.51 78.56,9.35 R59.1 77.8,15.47 76.71,16.56 U38.79
LS1: length 23.6
  TOP w0.254: U38.80 77.22,16.71 78.26,15.67 78.26,15.57 78.33,15.49 78.33,13.08 81.89,9.53 R60.1 81.99,9.53 85.06,6.45 J29.1
LS2: length 31.8
  TOP w0.254: J30.1 R61.1 60.86,7.67 59.77,8.76 59.77,11.51 65.76,17.5 65.76,20.8 67.87,22.91 v1(71.15,22.91) ; U38.77 75.69,23.14 75.46,22.91 v1(72.9,22.91)
  BOTTOM w0.254: v1(72.9,22.91) v1(71.15,22.91)
LS3: length 27.5
  TOP w0.254: U38.78 76.2,16.28 76.78,15.7 v1(76.78,9.8) ; v1(73.76,7.59) R62.1 J31.1
  BOTTOM w0.254: v1(73.76,7.59) 75.36,7.59 76.78,9.02 v1(76.78,9.8)
MAG_SCL: length 10.8
  TOP w0.254: 83.74,15.82 84.89,16.97 84.89,22.4 84.71,22.58 U38.95 ; 83.74,15.82 84.91,15.82 U39.1 ; 83.74,15.82 R58.2
MAG_SDA: length 8.6
  TOP w0.254: U39.16 R40.1 85.9,22.12 85.19,22.83 U38.96
MISO: length 10.3
  TOP w0.178: U18.2 48.13,12.7 47.5,13.34 41.81,13.34 41.48,13.67 40.01,13.67 39.85,13.51 U26.7
MOSI: length 5
  TOP w0.178: U18.5 41.76,15.24 40.82,14.3 U26.9
MS11: length 34.6
  TOP w0.254: U27.2 89.81,66.4 89.81,54.18 80.7,45.06 U38.39
MS12: length 31.9
  TOP w0.254: U38.40 80.21,45.24 89.36,54.38 89.36,64.31 U27.3
MS13: length 29.2
  TOP w0.254: U38.41 79.71,45.42 88.9,54.61 88.9,62.23 U27.4
MS21: length 58.3
  TOP w0.254: U38.34 83.21,44.27 92.1,53.16 92.1,86.97 U28.2
MS22: length 55.6
  TOP w0.254: U38.35 82.7,44.42 91.64,53.37 91.64,84.89 U28.3
MS23: length 52.9
  TOP w0.254: U28.4 91.19,82.8 91.19,53.57 82.19,44.58 U38.36
MS31: length 54.2
  TOP w0.254: v1(70.79,42.04) 68.3,44.53 68.3,65.05 U29.2 ; U38.88 81.2,33.43 77.95,36.68 v1(75.77,36.68)
  BOTTOM w0.254: v1(75.77,36.68) 75.36,37.08 75.36,37.47 v1(70.79,42.04)
MS32: length 51.6
  TOP w0.254: U38.87 80.7,33.27 77.9,36.07 v1(75.77,36.07) ; v1(71.73,40.21) 67.84,44.09 67.84,62.97 U29.3
  BOTTOM w0.254: v1(75.77,36.07) 75.77,36.14 75.54,36.14 74.5,37.19 74.5,37.44 v1(71.73,40.21)
MS33: length 48.8
  TOP w0.254: U29.4 67.39,60.88 67.39,43.59 v1(71.27,39.7) ; U38.86 80.21,33.1 77.85,35.46 v1(75.77,35.46)
  BOTTOM w0.254: v1(71.27,39.7) 75.51,35.46 v1(75.77,35.46)
MS41: length 58.4
  TOP w0.254: U38.44 78.21,45.62 70.59,53.24 70.59,85.62 U30.2
MS42: length 55.6
  TOP w0.254: U38.45 77.7,45.47 70.13,53.04 70.13,83.54 U30.3
MS43: length 52.9
  TOP w0.254: U38.46 77.22,45.29 69.67,52.83 69.67,81.46 U30.4
MS51: length 52.2
  TOP w0.254: U31.2 46.35,64.14 46.35,53.44 62.46,37.34 U38.53
MS52: length 50.2
  TOP w0.254: U38.54 62.31,36.83 45.9,53.24 45.9,62.05 U31.3
MS53: length 48.3
  TOP w0.254: U31.4 45.44,59.97 45.44,53.01 62.13,36.32 U38.55
MS61: length 89
  TOP w0.254: v1(75.82,33.63) 77.7,33.63 78.71,32.61 U38.83 ; U32.2 48.64,84.71 48.64,54.51 62.94,40.21 v1(67.89,40.21)
  BOTTOM w0.254: v1(67.89,40.21) 68.22,40.21 74.8,33.63 v1(75.82,33.63)
MS62: length 86.3
  TOP w0.254: U38.82 78.21,25.32 78.26,25.37 78.26,32.41 77.65,33.02 v1(75.82,33.02) ; U32.3 48.18,82.63 48.18,54.31 62.89,39.6 v1(67.89,39.6)
  BOTTOM w0.254: v1(75.82,33.02) 74.75,33.02 68.17,39.6 v1(67.89,39.6)
MS63: length 83.5
  TOP w0.254: U32.4 47.73,80.54 47.73,54.1 62.84,38.99 v1(67.89,38.99) ; U38.81 77.7,32.16 77.44,32.41 v1(75.87,32.41)
  BOTTOM w0.254: v1(67.89,38.99) 74.47,32.41 v1(75.87,32.41)
MS71: length 78.2
  TOP w0.254: U38.63 60.83,32.33 44.55,48.62 26.42,48.62 23.29,51.74 23.29,64.34 U33.2
MS72: length 76.3
  TOP w0.254: U38.64 60.68,31.83 44.35,48.16 26.21,48.16 22.83,51.54 22.83,62.26 U33.3
MS73: length 74.3
  TOP w0.254: U33.4 22.38,60.17 22.38,51.33 26.01,47.7 44.15,47.7 60.5,31.34 U38.65
MS81: length 98.1
  TOP w0.254: U38.58 61.65,34.82 45.57,50.9 27.43,50.9 25.58,52.76 25.58,84.91 U34.2
MS82: length 96.2
  TOP w0.254: U38.59 61.47,34.34 45.36,50.44 27.23,50.44 25.12,52.55 25.12,82.83 U34.3
MS83: length 94.2
  TOP w0.254: U34.4 24.66,80.75 24.66,52.35 27.03,49.99 45.16,49.99 61.32,33.83 U38.60
NRST: length 74.9
  TOP w0.254: U38.14 90.81,32.84 93.45,35.48 93.45,39.52 96.14,42.21 99.39,42.21 100.58,41.02 100.58,12.7 102.95,10.34 113.28,10.34 117.09,14.15 C4.2 117.09,18.11 117.22,18.24 R1.2 117.22,20.55 116.94,20.83 K5.2
P0_3: length 10.6
  TOP w0.178: v1(41.05,11.4) 41.99,11.4 42.55,10.85 44.98,10.85 45.54,11.4 47.5,11.4 47.52,11.43 U18.1 ; U26.4 v1(40.13,12.29)
  BOTTOM w0.178: v1(41.05,11.4) 41.02,11.4 v1(40.13,12.29)
SCLK: length 6.2
  TOP w0.178: U26.1 39.95,11.1 41.2,12.34 v1(41.2,13.06) ; U18.6 43.69,14.05 42.27,14.05 v1(42.21,14)
  BOTTOM w0.178: v1(41.2,13.06) 41.58,13.44 41.66,13.44 v1(42.21,14)
STEP_1: length 21.6
  TOP w0.254: U38.43 78.71,52.45 83.41,57.15 U27.7
STEP_2: length 45.1
  TOP w0.254: U38.37 81.71,44.75 90.73,53.77 90.73,75.64 U28.7
STEP_3: length 41.1
  TOP w0.254: U29.7 66.9,53.75 66.9,43.21 v1(69.82,40.23) ; U38.85 79.71,32.94 77.8,34.85 v1(75.77,34.85)
  BOTTOM w0.254: v1(75.77,34.85) 75.21,34.85 v1(69.82,40.23)
STEP_4: length 45
  TOP w0.254: U30.7 69.22,74.3 69.22,52.63 76.71,45.14 U38.47
STEP_5: length 41.3
  TOP w0.254: U38.56 61.95,35.84 U31.7
STEP_6: length 61.2
  TOP w0.254: U38.51 62.79,38.33 47.27,53.85 47.27,73.38 U32.7
STEP_7: length 67.3
  TOP w0.254: U38.66 60.35,30.84 43.94,47.24 25.78,47.24 21.82,51.21 21.82,53.11 U33.7
STEP_8: length 87.2
  TOP w0.254: U38.61 61.16,33.32 44.96,49.53 26.82,49.53 24.21,52.15 24.21,73.58 U34.7
SWCLK: length 35.9
  TOP w0.254: J22.1 53.26,9.91 67.31,23.95 v1(69.88,23.95) ; U38.76 74.93,23.95 v1(73.96,23.95)
  BOTTOM w0.254: v1(69.88,23.95) v1(73.96,23.95)
SWDIO: length 36.7
  TOP w0.254: J22.2 50.72,8.03 70.54,27.84 U38.72
VDCDC: length 17.9
  TOP w0.178: U26.31 34.85,10.03 34.49,9.68 v1(34.11,9.68) 33.76,9.32 C69.1 ; U26.19 35.26,16.64 34.16,17.73 C45.1 33.4,17.02 32.46,16.08 L9.2
  TOP w0.254: L9.2 30.73,16.08 30.48,15.82 30.48,14.63 30.84,14.27 31.17,14.27 v1(31.85,13.59)
  BOTTOM w0.254: v1(34.11,9.68) 34.11,11.33 v1(31.85,13.59)
XTAL_8M_1: length 12.7
  TOP w0.254: U38.12 96.29,31.83 X1.2
  TOP w0.508: X1.2 97.08,27.38 97.1,27.36 C2.2
XTAL_8M_2: length 13.5
  TOP w0.254: U38.13 93.07,32.33 X1.1
  TOP w0.508: C3.2 97.05,37.49 97.08,37.47 X1.1
N16774269: length 4.3
  TOP w0.178: X2.2 40.97,18.47 39.62,17.12 39.34,17.12 38.46,16.23 U26.11
N16774273: length 3.6
  TOP w0.178: U26.12 38.05,16.46 39.09,17.5 X2.1
N16774277: length 5.8
  TOP w0.178: U26.29 32.69,11.51 32.05,12.14 29.92,12.14 29.08,11.3 Y1.1
N16774293: length 4.4
  TOP w0.178: U26.30 32.64,11.1 30.66,9.12 Y1.3
N16774335: length 2.7
  TOP w0.178: L9.1 33.1,14.96 33.35,14.71 U26.21
N16779828: length 2.5
  TOP w0.381: U27.6 U27.5
N16781946: length 5.1
  TOP w2.032: U27.14 J14.1
N16781949: length 5.1
  TOP w2.032: U27.13 J14.2
N16781952: length 5.1
  TOP w2.032: U27.12 J14.3
N16781955: length 5.1
  TOP w2.032: U27.11 J14.4
N16782088: length 2.5
  TOP w0.381: U28.6 U28.5
N16782148: length 5.1
  TOP w2.032: U28.14 J15.1
N16782150: length 5.1
  TOP w2.032: U28.13 J15.2
N16782152: length 5.1
  TOP w2.032: U28.12 J15.3
N16782154: length 5.1
  TOP w2.032: U28.11 J15.4
N16782514: length 2.5
  TOP w0.381: U29.6 U29.5
N16782574: length 5.1
  TOP w2.032: J16.1 U29.14
N16782576: length 5.1
  TOP w2.032: U29.13 J16.2
N16782578: length 5.1
  TOP w2.032: J16.3 U29.12
N16782580: length 5.1
  TOP w2.032: U29.11 J16.4
N16782582: length 2.5
  TOP w0.381: U30.6 U30.5
N16782654: length 5.1
  TOP w2.032: U30.14 J17.1
N16782656: length 5.1
  TOP w2.032: U30.13 J17.2
N16782658: length 5.1
  TOP w2.032: U30.12 J17.3
N16782660: length 5.1
  TOP w2.032: U30.11 J17.4
N16783067: length 2.5
  TOP w0.381: U31.6 U31.5
N16783127: length 5.1
  TOP w2.032: J18.1 U31.14
N16783129: length 5.1
  TOP w2.032: J18.2 U31.13
N16783131: length 5.1
  TOP w2.032: J18.3 U31.12
N16783133: length 5.1
  TOP w2.032: J18.4 U31.11
N16783135: length 2.5
  TOP w0.508: U32.5 U32.6
N16783207: length 5.1
  TOP w2.032: U32.14 J19.1
N16783209: length 5.1
  TOP w2.032: U32.13 J19.2
N16783211: length 5.1
  TOP w2.032: U32.12 J19.3
N16783213: length 5.1
  TOP w2.032: U32.11 J19.4
N16784006: length 2.5
  TOP w0.381: U33.6 U33.5
N16784066: length 5.1
  TOP w2.032: J20.1 U33.14
N16784068: length 5.1
  TOP w2.032: J20.2 U33.13
N16784070: length 5.1
  TOP w2.032: J20.3 U33.12
N16784072: length 5.1
  TOP w2.032: J20.4 U33.11
N16784074: length 2.5
  TOP w0.381: U34.6 U34.5
N16784146: length 5.1
  TOP w2.032: U34.14 J21.1
N16784148: length 5.1
  TOP w2.032: J21.2 U34.13
N16784150: length 5.1
  TOP w2.032: U34.12 J21.3
N16784152: length 5.1
  TOP w2.032: U34.11 J21.4
N16789605: length 15.7
  TOP w0.381: D1.2 3.89,34.82 ; D1.2 5,33.86 ; D1.2 2.77,33.86 ; D1.2 3.89,32.89 ; 4.14,26.57 C70.2 ; C70.2 4.88,25.88 ; C70.2 4.88,27.25 ; L10.1 3.66,20.4 ; L10.1 5.28,18.31 ; L10.1 3.66,16.23 ; L10.1 2.03,18.31 ; 8.59,35.26 U36.8 8,33.86
N16792399: length 6.6
  TOP w0.508: R36.1 15.7,24.97 R37.2 13.28,26.97 12.4,27.86 U36.4
N16801584: length 1.9
  TOP w0.762: R38.1 D2.1
N16804138: length 1.8
  TOP w0.508: R39.1 D3.1
N16843413: length 2.1
  TOP w0.254: C18.1 73.94,19.25 74.02,19.18 U12.20
N16843463: length 2
  TOP w0.254: C16.2 73.38,13.13 73.48,13.23 U12.10
N16843543: length 6.6
  TOP w0.254: U12.13 75.62,14.78 76.23,14.17 76.23,10.26 75.97,10.01 R23.2
N16843618: length 2.1
  TOP w0.254: U39.8 87.43,13.23 87.93,12.73 C64.1
N16843634: length 5.6
  TOP w0.254: v1(89,15.44) 88.93,15.37 U39.12 ; C64.2 v1(89.26,12.4)
  BOTTOM w0.254: v1(89,15.44) 89.81,14.63 89.81,12.95 v1(89.26,12.4)
N167889588: length 3.7
  TOP w0.508: U36.1 8.59,27.86 7.29,26.57 C70.1
N168435809: length 2.8
  TOP w0.254: U39.10 89.71,14.35 89.87,14.2 C65.1

## Copper pours and planes (outline as drawn; the poured copper is in the pictures)
GND on TOP (solid shape): 36.68,1.32 38.07,1.32 38.07,6.22 38.99,6.22 38.99,0.84 33.99,0.84 33.99,3.48 31.98,3.48 31.98,0.84 29.29,0.84 29.29,3.48 27.28,3.48 27.28,0.84 24.59,0.84 24.59,5.26 25.07,5.26 25.07,1.32 26.77,1.32 26.77,3.96 29.77,3.96 29.77,1.32 31.47,1.32 31.47,3.96 34.47,3.96 34.47,1.32 36.17,1.32 36.17,6.22 36.68,6.22
